# Altium PCB hat.PcbDoc (part 1 of 2)
Units mm, origin at the board's own origin, x right, y up, seen from the top; angles counter-clockwise.
Board outline 64 x 85 mm, 4 copper layers (Top Layer, Ground Plane, Power Plane, Bottom Layer), stack 0.844 mm thick; 119 components, 62 nets, 343 pads, 67 vias.
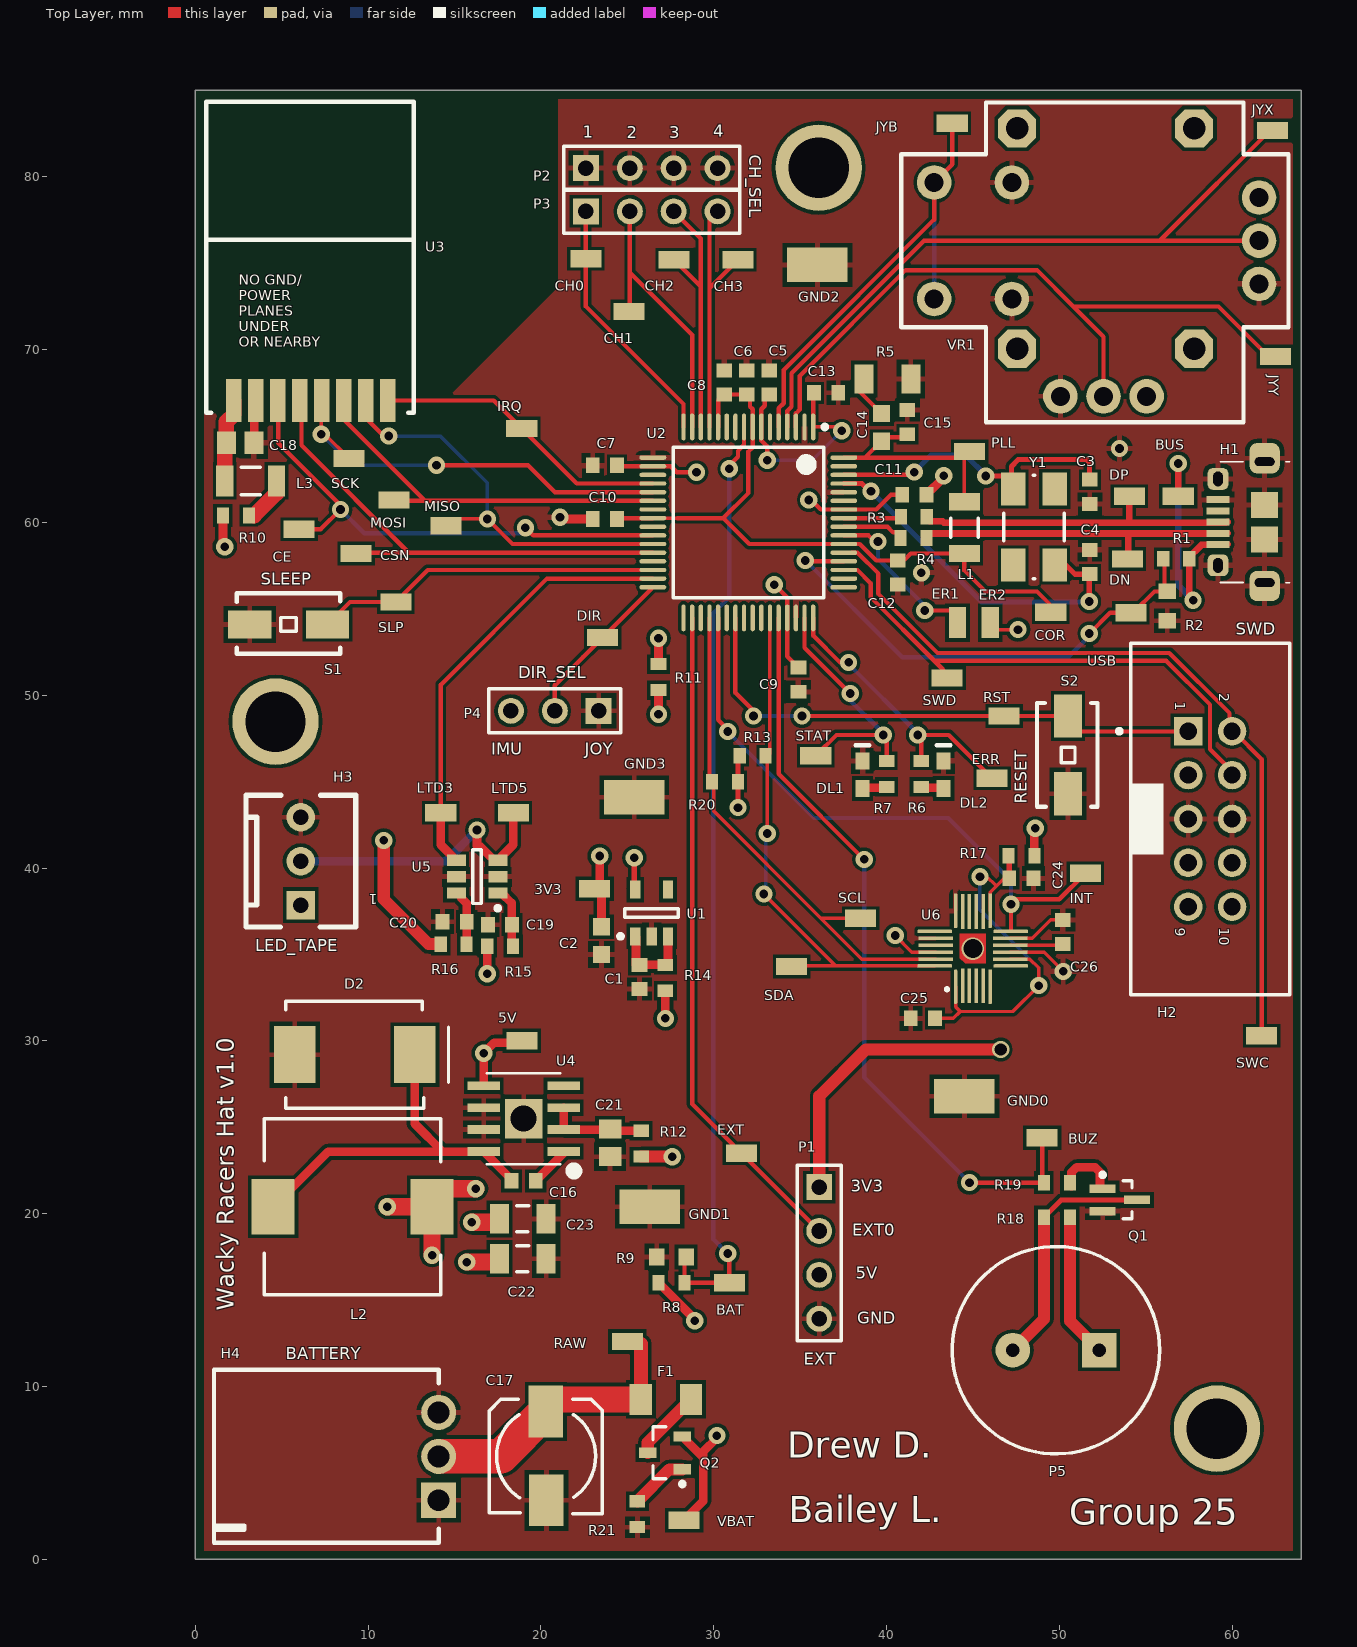
[diagram p0: Top Layer view]
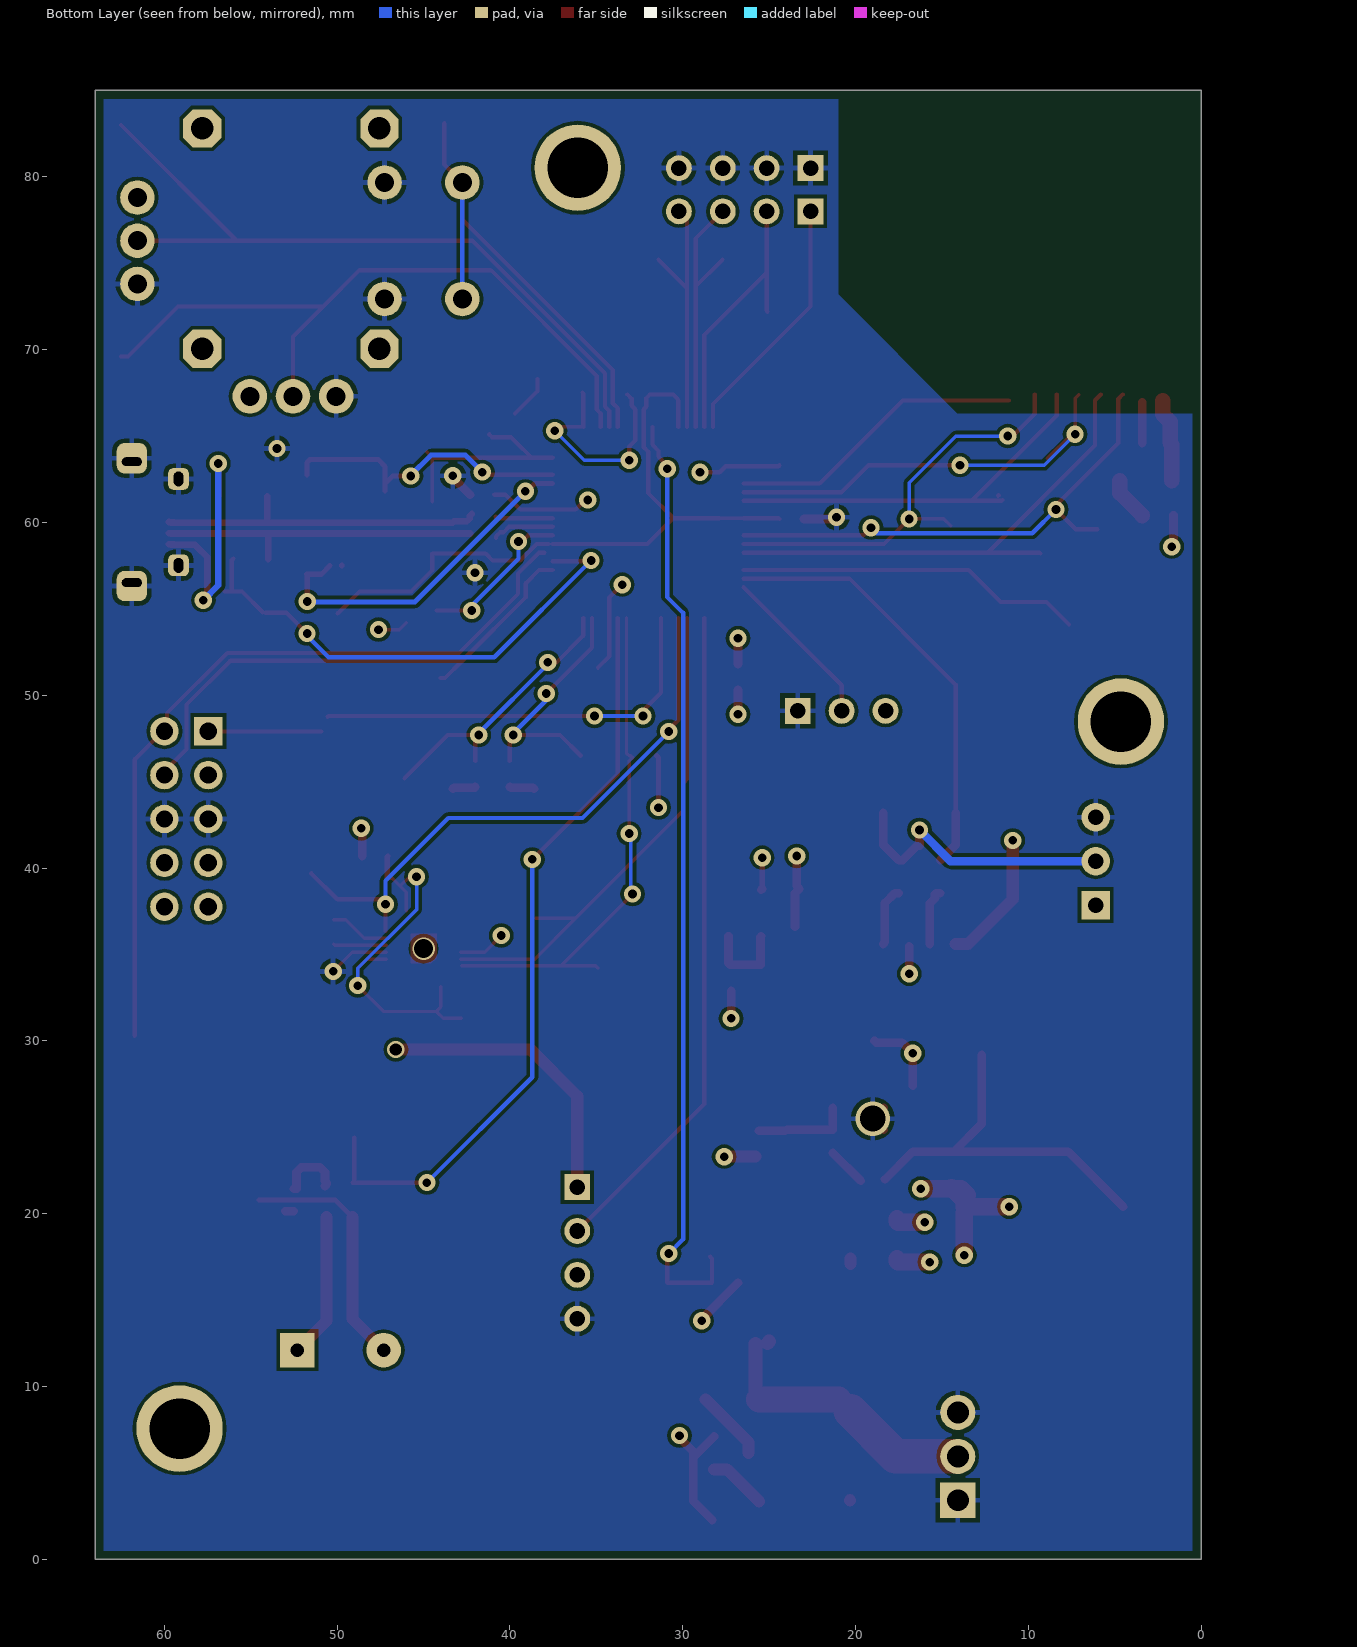
[diagram p1: Bottom Layer view, seen from below]
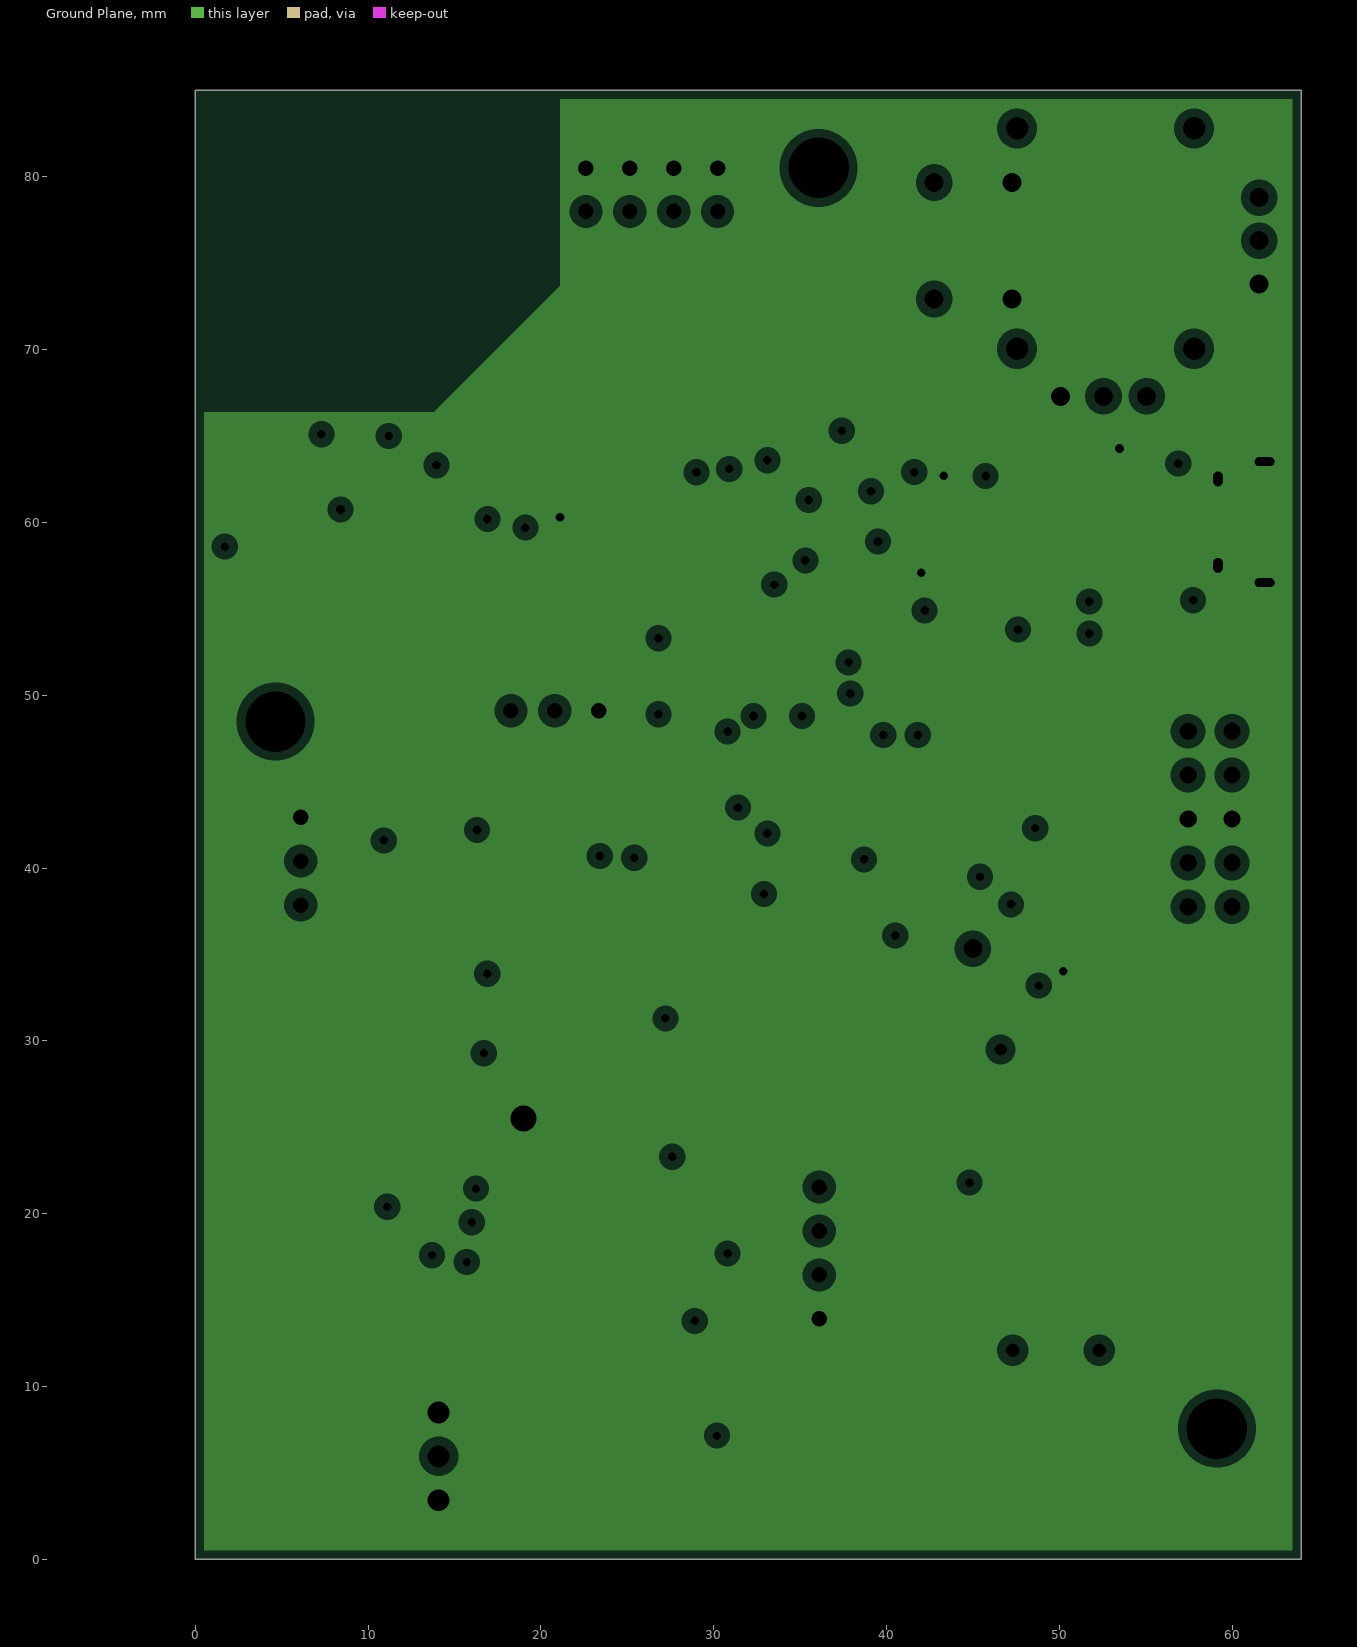
[diagram p2: Ground Plane, clearances drawn from the general rule]
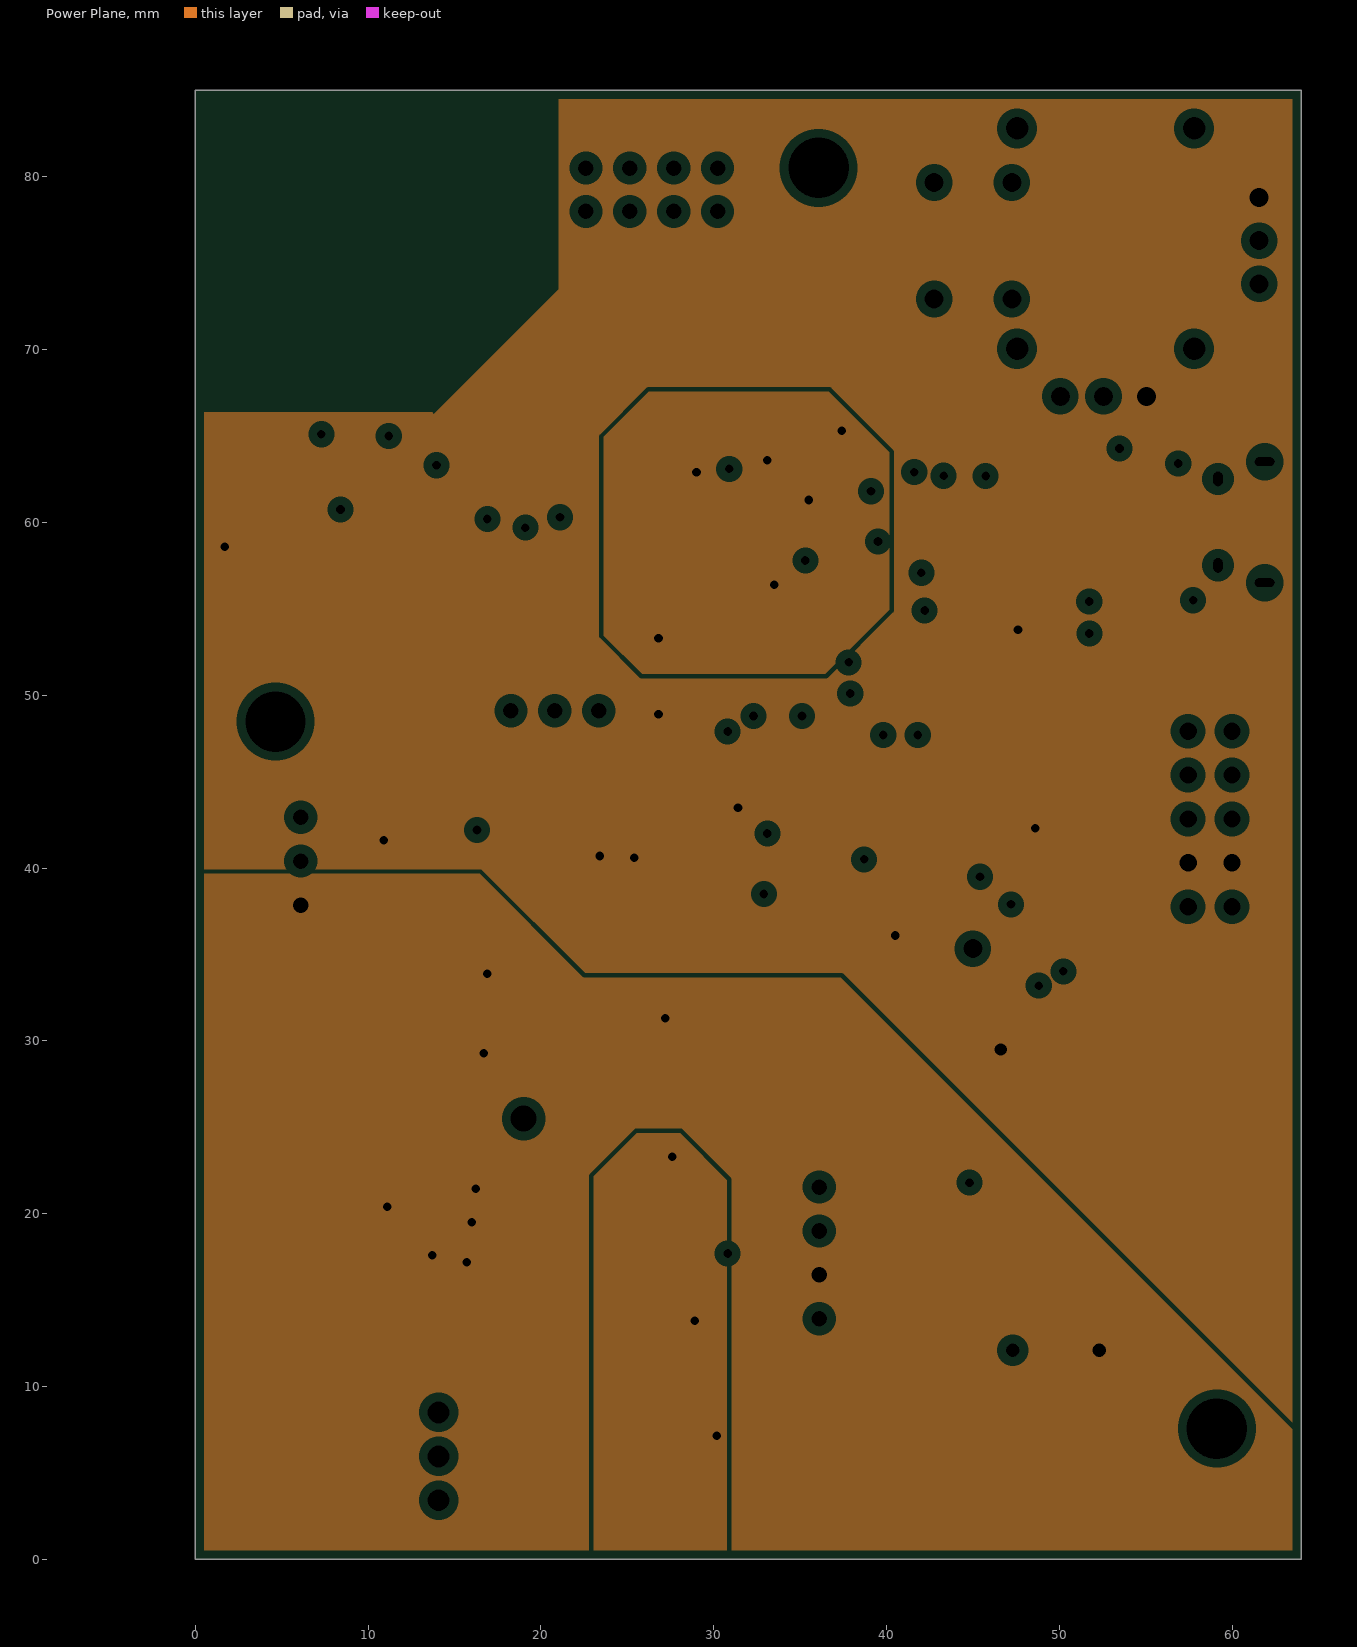
[diagram p3: Power Plane, clearances drawn from the general rule]

## Layer stack, top to bottom
Top Solder: solder mask 0.0102, Solder Resist, Dk 3.5
Top Layer: signal copper 0.0356
Dielectric 1: core 0.32, FR-4, Dk 4.8
Ground Plane: plane copper 0.036, net GND
Dielectric 3: prepreg 0.127, Dk 4.2
Power Plane: plane copper 0.036, net (Multiple Nets)
Dielectric 4: core 0.254, Dk 4.2
Bottom Layer: signal copper 0.0356
Bottom Solder: solder mask 0.0102, Solder Resist, Dk 3.5

## Board outline
0,85 64,85 64,0 0,0 0,85

## Design rules (kind name [scope] priority, off if disabled: settings)
BoardOutlineClearance [All] p1: gap=0.5 ignorepadtopadclearanceinfootprint=FALSE
Clearance GND_POLY [InNamedPolygon('GND')] p1: gap=0.254 ignorepadtopadclearanceinfootprint=FALSE
Clearance Min_Clearance_Circuit_Labs [All] p2: gap=0.2 ignorepadtopadclearanceinfootprint=FALSE
DiffPairsRouting [All] p1: maxlimit=0.254 minlimit=0.254 mostfreqgap=0.254 toplayer_minwidth=0.381 toplayer_maxwidth=0.381 toplayer_prefwidth=0.381 bottomlayer_minwidth=0.381 bottomlayer_maxwidth=0.381 bottomlayer_prefwidth=0.381 maxuncoupledlength=12.7
FanoutControl Fanout_BGA [IsBGA] p1 off: bgadir=Out bgaviamode=Centered fanoutstyle=Auto fanoutdirection=Alternating viagrid=0.025 // Fanout_BGA (Default Rule)
Height [All] p1: minheight=0 maxheight=50.8 prefheight=12.7
HoleSize [All] p1: absolutevalues=TRUE maxlimit=10 minlimit=0.3 maxpercent=80.000 minpercent=20.000
MinimumAnnularRing [All] p1: minimumring=0.1
MinimumSolderMaskSliver [All] p1: minsoldermaskwidth=0.102
NetAntennae [All] p1: netantennaetolerance=1
PlaneClearance [All] p1: clearance=0.508
PlaneConnect [All] p1: planeconnectstyle=Relief reliefexpansion=0.508 reliefentries=4 reliefconductorwidth=0.254 reliefairgap=0.254
PolygonConnect [All] p1: connectstyle=Relief reliefconductorwidth=0.305 reliefentries=4 polygonreliefangle="90 Angle" airgapwidth=0.254
RoutingVias [All] p1: holewidth=0.5 width=1 viastyle="Through Hole" minholewidth=0.3 minwidth=0.8 maxholewidth=1 maxwidth=2
SMDNeckDown [All] p1 off: percent=50.000
SMDToCorner [All] p1: distance=98425
SMDToPlane [All] p1: distance=1968504
SilkToSolderMaskClearance SilkscreenOverComponentPads [IsPad] p1: minsilkscreentomaskgap=0.2 clearancetoexposedcopper=TRUE
SolderMaskExpansion [All] p1: expansion=0.102
ViasUnderSMD [All] p1: allowed=FALSE
Width [All] p1: maxlimit=2 minlimit=0.2 preferedwidth=0.3
21 further rules are at their usual default settings.

## Classes and differential pairs
differential pair D: +D_P -D_N

## Components (designator, comment, footprint, x,y, rotation, side; value= is the part's Value field where it differs from the comment)
3V3 "3V3" TP_0603 23.1,38.8 r0 top value=TP
5V "3V3" TP_0603 18.9,30 r180 top value=TP
BAT "3V3" TP_0603 30.9,16 r180 top value=TP
BUS "3V3" TP_0603 56.873,61.514 r0 top value=TP
BUZ "3V3" TP_0603 49,24.4 r180 top value=TP
C1 "1uF" CAPC1608L 25.7,33.7 r90 top
C2 "4.7uF" CAPC1608N 23.5,35.8 r90 top
C3 "27pF" CAPC1608L 51.761,61.776 r90 top
C4 "27pF" CAPC1608L 51.756,57.711 r270 top
C5 "100nF" CAPC1608L 33.2,68.1 r270 top
C6 "100nF" CAPC1608L 31.9,68.1 r270 top
C7 "100nF" CAPC1608L 23.7,63.3 r0 top
C8 "100nF" CAPC1608L 30.6,68.1 r270 top
C9 "100nF" CAPC1608L 34.9,50.9 r90 top
C10 "100nF" CAPC1608L 23.7,60.2 r0 top
C11 "100nF" CAPC1608L 41.6,61.6 r180 top
C12 "100nF" CAPC1608L 40.65,57.1 r90 top
C13 "100nF" CAPC1608L 36.5,67.5 r180 top
C14 "4.7uF" CAPC1608N 39.7,65.5 r270 top
C15 "100nF" CAPC1608L 41.2,65.8 r90 top
C16 "100nF" CAPC1608L 19,21.9 r0 top
C17 "100uF/16V" NICH-1 20.292,5.976 r90 top
C18 "10uF" CAPC2012L 2.6,64.6 r180 top
C19 "100nF" CAPC1608L 17.63,36.725 r0 top
C20 "100nF" CAPC1608L 15,36.9 r0 top
C21 "10uF" CAPC2012L 24,24.1 r90 top
C22 "22uF" CAPC3216L 18.95,17.4 r180 top
C23 "22uF" CAPC3216L 18.95,19.7 r180 top
C24 "100nF" CAPC1608L 47.8,39.4 r180 top
C25 "10nF" CAPC1608L 42.1,31.3 r180 top
C26 "100nF" CAPC1608L 50.2,36.3 r90 top
CE "3V3" TP_0603 6,59.6 r180 top value=TP
CH0 "3V3" TP_0603 22.6,75.25 r0 top value=TP
CH1 "3V3" TP_0603 25.1,72.2 r180 top value=TP
CH2 "3V3" TP_0603 27.7,75.2 r180 top value=TP
CH3 "3V3" TP_0603 31.4,75.2 r180 top value=TP
COR "3V3" TP_0603 49.5,54.8 r0 top value=TP
CSN "3V3" TP_0603 9.3,58.2 r180 top value=TP
D2 "MBRS330T3G 30V 4A" SMC 9.225,29.2 r0 top
DIR "3V3" TP_0603 23.563,53.338 r180 top value=TP
DL1 "Green" WL-SMCW0603 38.6,46.2 r270 top
DL2 "Red" WL-SMCW0603 43.3,46.2 r270 top
DN "3V3" TP_0603 53.932,57.889 r180 top value=TP
DP "3V3" TP_0603 54.046,61.511 r180 top value=TP
ER1 "Erase" TP_0603 44.1,54.2 r90 top value=TP
ER2 "3V3" TP_0603 46,54.2 r90 top value=TP
ERR "3V3" TP_0603 46.1,45.2 r0 top value=TP
EXT "3V3" TP_0603 31.6,23.5 r0 top value=TP
F1 "2A" RESC3216N 27.231,9.26 r0 top
GND0 "TP" TP_1206 44.5,26.8 r180 top
GND1 "TP" TP_1206 26.3,20.4 r180 top
GND2 "TP" TP_1206 36,74.9 r180 top
GND3 "TP" TP_1206 25.4,44.1 r180 top
H1 "JS_USB_MICRO_B" FCI_USB_10118194-0001LF 63.324,60.016 r90 top
H2 "Header 5X2 Vert" IDC2.54-V10D 58.719,42.84 r270 top
H3 "3 Pin Molex KK Hdr" MOLEX_KK_3_HDR 6.1,37.86 r90 top
H4 "Battery_HEADER_3pin" BATT_HEADER_3POS 14.081,5.96 r90 top
INT "3V3" TP_0603 51.5,39.7 r180 top value=TP
IRQ "3V3" TP_0603 18.885,65.432 r180 top value=TP
JYB "3V3" TP_0603 43.8,83.1 r180 top value=TP
JYX "3V3" TP_0603 62.321,82.682 r180 top value=TP
JYY "3V3" TP_0603 62.5,69.6 r180 top value=TP
L1 "1A max, Idc 0.3R," INDC3216L 44.5,59.7 r270 top
L2 "IND 5.2UH 6A" INDUCTOR5u2 9.1,20.4 r0 top
L3 "1A max, Idc 0.3R," INDC3216L 3.2,62.4 r0 top
LTD3 "3V3" TP_0603 14.2,43.2 r0 top value=TP
LTD5 "3V3" TP_0603 18.4,43.2 r0 top value=TP
MISO "3V3" TP_0603 14.5,59.8 r180 top value=TP
MOSI "3V3" TP_0603 11.5,61.3 r180 top value=TP
P1 "JA_PIN_Header 4" HDR1X4 36.1,21.54 r270 top
P2 "JA_PIN_Header 4" HDR1X4 22.6,80.501 r0 top
P3 "JA_PIN_Header 4" HDR1X4 22.6,78 r0 top
P4 "JA_PIN_Header 3" HDR1X3 23.34,49.1 r180 top
P5 "Piezo Buzzer" BUZZER 52.3,12.1 r180 top
PLL "3V3" TP_0603 44.8,64.1 r0 top value=TP
Q1 "BC817W" SOT323_M 53.5,20.8 r0 top
Q2 "SSM3J328R,LF" SOT23_L 27.181,6.16 r180 top
R1 "27K" RESC1608L 56.76,57.901 r0 top
R2 "47K" RESC1608N 56.235,55.162 r90 top
R3 "27R" RESC1608L 41.575,60.325 r180 top
R4 "27R" RESC1608L 41.55,59.1 r180 top
R5 "1R" RESC3216L 40.05,68.3 r180 top
R6 "3K" RESC1608L 42,45.45 r270 top
R7 "2K" RESC1608L 40,45.45 r270 top
R8 "62K" RESC1608L 27.55,16 r180 top
R9 "47K" RESC1608N 27.55,17.5 r0 top
R10 "0R" RESC1608L 2.35,60.4 r180 top
R11 "0R" RESC1608L 26.8,51.05 r270 top
R12 "0R" RESC1608L 25.8,24.05 r90 top
R13 "4K7" RESC1608L 32.25,46.5 r180 top
R14 "0R" RESC1608L 27.2,33.65 r90 top
R15 "0R" RESC1608L 17.641,35.484 r0 top
R16 "0R" RESC1608L 14.95,35.6 r180 top
R17 "0R" RESC1608L 47.8,40.7 r0 top
R18 "1K" RESC1608L 49.85,19.8 r0 top
R19 "1K" RESC1608L 49.85,21.8 r180 top
R20 "4K7" RESC1608L 30.65,45 r0 top
R21 "1K" RESC1608L 25.581,2.61 r90 top
RAW "3V3" TP_0603 25,12.6 r180 top value=TP
RST "3V3" TP_0603 46.8,48.8 r0 top value=TP
S1 "EVQPNF05M" EVQPNF05M 5.396,54.098 r0 top
S2 "EVQPNF05M" EVQPNF05M 50.5,46.55 r90 top
SCK "3V3" TP_0603 8.9,63.7 r0 top value=TP
SCL "3V3" TP_0603 38.5,37.1 r180 top value=TP
SDA "3V3" TP_0603 34.5,34.3 r180 top value=TP
SLP "3V3" TP_0603 11.6,55.4 r0 top value=TP
STAT "3V3" TP_0603 35.9,46.5 r180 top value=TP
SWC "3V3" TP_0603 61.7,30.3 r180 top value=TP
SWD "3V3" TP_0603 43.5,51 r180 top value=TP
U1 "CAT6219-330TDGT3" SOT95P280X145-5N 26.4,37.4 r90 top
U2 "ATSAM4S8BA-ANR" LQFP64_L 32,60 r270 top locked
U3 "nRF24 SMD" NRF24 0.627,66.353 r0 top
U4 "ADP2302ARDZ-5.0 BUCK" RD_8_1 19,25.5 r180 top locked value=Value
U5 "SN74LVC1T45" SOT23-6_N 16.3,39.5 r180 top
U6 "MPU-9250" QUAD24 43.993,33.985 r90 top locked
USB "3V3" TP_0603 54.134,54.774 r0 top value=TP
VBAT "3V3" TP_0603 28.281,2.26 r0 top value=TP
VR1 "Joystick 10k with Sw" Joystick_Sw 61.55,76.3 r0 top
Y1 "12MHz" 6.0X3.5-4 48.53,59.731 r90 top

## Footprints (in the part's own frame and the unit in brackets; to place one, negate y for a bottom-side part, rotate by r counter-clockwise, add the part's x,y. Pads: shape width x height; smd on the part's side, far side on the other; paste and mask are expansions set on the pad)
6.0X3.5-4 [mm] "4 SMD 6.0X3.5 mm No Lead Crystal"
  rect 1.9x1.4 smd: 1(-2.2,-1.2) 2(2.2,-1.2) 3(2.2,1.2) 4(-2.2,1.2)
  silkscreen extent -3,-1.75 3,1.75, body extent -3,-1.75 3,1.75, height 1.2
BATT_HEADER_3POS [mil]
  rect 80x80 hole 50: 1(-100,0)
  round 80 hole 50: 2(0,0) 3(100,0)
  silkscreen extent -197,0 197,512, body extent -197,-31 200,504, height 294
BUZZER [mm]
  rect 2x2 hole 0.8: 1(0,0)
  round 2 hole 0.8: 2(5,0)
  silkscreen extent -3.5,-6 8.5,6, body extent -3.58,-6.08 8.58,6.08, height 6.5
CAPC1608L [mm] "Chip Capacitor, Body 1.6x0.8mm, IPC High Density"
  rect 0.8x0.9 smd: 1(-0.7,0) 2(0.7,0)
  body extent -0.87,-0.48 0.87,0.48, height 0.85
CAPC1608N [mm] "Chip Capacitor, Body 1.6x0.8mm, IPC Medium Density"
  rect 1x1 smd: 1(-0.8,0) 2(0.8,0)
  body extent -0.87,-0.48 0.87,0.48, height 0.85
CAPC2012L [mm] "Chip Capacitor, Body 2.0x1.3mm, IPC High Density"
  rect 1.1x1.3 smd: 1(-0.8,0) 2(0.8,0)
  body extent -1.1,-0.72 1.1,0.72, height 1.1
CAPC3216L [mm] "Chip Capacitor, Body 3.2x1.6mm, IPC High Density"
  rect 1.1x1.7 smd: 1(-1.35,0) 2(1.35,0)
  silkscreen extent -0.35,-0.75 0.35,0.75, body extent -1.7,-0.9 1.7,0.9, height 1.35
EVQPNF05M [mm] "Panansonic light touch SMD push button switch"
  rect 2.5x1.6 smd: 1(-2.25,0) 2(2.25,0)
  silkscreen extent -3,-1.7 3,1.8, body extent -3,-1.7 3,1.8, height 5
FCI_USB_10118194-0001LF [mm] "Micro USB B Type Receptacle"
  rect 0.4x1.35 smd mask+0.07: 1(-1.3,4.15) 2(-0.65,4.15) 3(0,4.15) 4(0.65,4.15) 5(1.3,4.15)
  rrect50% 1.75x1.75 hole 0.5 slot 1.15 at 90 deg copper offset -0.2,0 paste+0 mask+0.1: 6(-3.5,1.45)
  rrect50% 1.25x1.2 hole 0.55 slot 0.85 at 0 deg: 6(-2.5,4.15) 6(2.5,4.15)
  rect 1.5x1.55 smd: 6(-1,1.45) 6(1,1.45)
  rrect50% 1.75x1.75 hole 0.5 slot 1.15 at 90 deg copper offset 0.2,0 paste+0 mask+0.1: 6(3.5,1.45)
  silkscreen extent -3.5,0 3.5,4
HDR1X3 [mm] "Connector; Header; 3 Position"
  rect 1.5x1.5 hole 0.9: 1(0,0)
  round 1.5 hole 0.9: 2(2.54,0) 3(5.08,0)
  silkscreen extent -1.27,-1.27 6.35,1.27, body extent -1.27,-1.27 6.35,1.27, height 8.89
HDR1X4 [mm] "Connector; Header; 4 Position"
  rect 1.5x1.5 hole 0.9: 1(0,0)
  round 1.5 hole 0.9: 2(2.54,0) 3(5.08,0) 4(7.62,0)
  silkscreen extent -1.27,-1.27 8.89,1.27, body extent -1.26,-1.3 8.86,1.2, height 2.1
IDC2.54-V10D [mm] "Connector; IDC, Low Profile Male Header, Thru-Hole; 10 Position; Vertical; Pitch 2.54 mm; Body 20.32 x 9.2 x 9.45 mm (LxWxH)"
  rect 1.65x1.65 hole 1: 1(-5.08,-1.27)
  round 1.65 hole 1: 2(-5.08,1.27) 3(-2.54,-1.27) 4(-2.54,1.27) 5(0,-1.27) 6(0,1.27) 7(2.54,-1.27) 8(2.54,1.27) 9(5.08,-1.27) 10(5.08,1.27)
  silkscreen extent -10.16,-5.37 10.16,4.6, body extent -10.16,-4.6 10.16,4.6, height 9.45
INDC3216L [mm] "Chip Inductor, Body 3.2x1.6mm, IPC High Density"
  rect 1x1.8 smd: 1(-1.5,0) 2(1.5,0)
  silkscreen extent -0.55,-0.8 0.55,0.8, body extent -1.75,-0.95 1.75,0.95, height 1.9
INDUCTOR5u2 [mm]
  rect 2.5x3.2 smd: 1(-4.6,0) 2(4.6,0)
  silkscreen extent -5.1,-5.1 5.1,5.1, body extent -5,-5 5,5, height 3.8
Joystick_Sw [mm]
  round 2 hole 1.1: 1(0,2.5) 2(0,0) 3(0,-2.5) 4(-6.5,-9) 5(-9,-9) 6(-11.5,-9) 7(-14.3,-3.37) 8(-18.8,-3.37) 9(-18.8,3.37) 10(-14.3,3.37)
  oct 2.2x2.2 hole 1.3: 11(-14,-6.25) 12(-3.75,-6.25) 13(-14,6.5) 14(-3.75,6.5)
  silkscreen extent -20.7,-10.5 1.7,8, body extent -22.72,-12.9 4.9,13.77, height 30.23
LQFP64_L [mm] "Thin QFP, 64-Leads, Body 10x10mm, Pitch 0.5mm, IPC High Density"
  oval 1.55x0.25 smd mask+0.07: 1(-5.525,3.75) 2(-5.525,3.25) 3(-5.525,2.75) 4(-5.525,2.25) 5(-5.525,1.75) 6(-5.525,1.25) 7(-5.525,0.75) 8(-5.525,0.25) 9(-5.525,-0.25) 10(-5.525,-0.75) 11(-5.525,-1.25) 12(-5.525,-1.75) 13(-5.525,-2.25) 14(-5.525,-2.75) 15(-5.525,-3.25) 16(-5.525,-3.75) 33(5.525,-3.75) 34(5.525,-3.25) 35(5.525,-2.75) 36(5.525,-2.25) 37(5.525,-1.75) 38(5.525,-1.25) 39(5.525,-0.75) 40(5.525,-0.25) 41(5.525,0.25) 42(5.525,0.75) 43(5.525,1.25) 44(5.525,1.75) 45(5.525,2.25) 46(5.525,2.75) 47(5.525,3.25) 48(5.525,3.75)
  oval 0.25x1.55 smd mask+0.07: 17(-3.75,-5.525) 18(-3.25,-5.525) 19(-2.75,-5.525) 20(-2.25,-5.525) 21(-1.75,-5.525) 22(-1.25,-5.525) 23(-0.75,-5.525) 24(-0.25,-5.525) 25(0.25,-5.525) 26(0.75,-5.525) 27(1.25,-5.525) 28(1.75,-5.525) 29(2.25,-5.525) 30(2.75,-5.525) 31(3.25,-5.525) 32(3.75,-5.525) 49(3.75,5.525) 50(3.25,5.525) 51(2.75,5.525) 52(2.25,5.525) 53(1.75,5.525) 54(1.25,5.525) 55(0.75,5.525) 56(0.25,5.525) 57(-0.25,5.525) 58(-0.75,5.525) 59(-1.25,5.525) 60(-1.75,5.525) 61(-2.25,5.525) 62(-2.75,5.525) 63(-3.25,5.525) 64(-3.75,5.525)
  silkscreen extent -5.65,-4.35 4.35,4.55, body extent -5,-5 5,5, height 1.6
MOLEX_KK_3_HDR [mil] "MOLEX_KK_3_HDR"
  rect 65x65 hole 35.43: 1(0,0)
  round 65 hole 35.43: 2(100,0) 3(200,0)
  silkscreen extent -50,-125 250,125, body extent -50,-114 250,114, height 461
NICH-1 [mm] "Electrolytic capacitor"
  rect 3x2 smd: 1(-2.561,-0.022) 2(2.584,0.011)
  silkscreen extent -3.34,-3.25 3.3,3.3, body extent -3.2,-3.2 3.2,3.2, height 5.3
NRF24 [mm]
  rect 0.9x2.5 smd: 1(1.6,0.7) 2(2.871,0.7) 3(4.143,0.7) 4(5.414,0.7) 5(6.686,0.7) 6(7.957,0.7) 7(9.229,0.7) 8(10.5,0.7)
  silkscreen extent 0,0 12,18, body extent 0,0 12,18, height 2.27
QUAD24 [mm]
  oval 2x0.2 smd paste+0.02 mask+0.015: 1(-0.85,0)
  rect 2x0.2 smd paste+0.02 mask+0.015: 2(-0.8,-0.4) 3(-0.8,-0.8) 4(-0.8,-1.2) 5(-0.8,-1.6) 14(3.5,-1.6) 15(3.5,-1.2) 16(3.5,-0.8) 17(3.5,-0.4)
  rrect50% 2x0.2 smd paste+0.02 mask+0.015: 6(-0.85,-2) 13(3.55,-2) 18(3.55,0)
  rrect50% 0.2x2 smd paste+0.02 mask+0.015: 7(0.35,-3.2) 12(2.35,-3.2) 19(2.35,1.2) 24(0.35,1.2)
  rect 0.2x2 smd paste+0.02 mask+0.015: 8(0.75,-3.15) 9(1.15,-3.15) 10(1.55,-3.15) 11(1.95,-3.15) 20(1.95,1.15) 21(1.55,1.15) 22(1.15,1.15) 23(0.75,1.15)
  Top Layer region: 0.5,-1.75 0.5,-0.55 0.8,-0.25 2.2,-0.25 2.2,-1.75
  silkscreen extent -1.05,0.45 -0.95,0.55
RD_8_1 [mil]
  rect 74x20 smd paste+0 mask+0: 1(-91,75) 2(-91,25) 3(-91,-25) 4(-91,-75) 5(91,-75) 6(91,-25) 7(91,25) 8(91,75)
  rect 84.65x90 smd paste-44.5 mask+0: EPAD(0,0)
  silkscreen extent -118,-104 84,123, body extent 0,0 10,10, height 10
RESC1608L [mm] "Chip Resistor, Body 1.6x0.8mm, IPC High Density"
  rect 0.7x0.9 smd: 1(-0.75,0) 2(0.75,0)
  body extent -0.85,-0.48 0.85,0.48, height 0.9
RESC1608N [mm] "Chip Resistor, Body 1.6x0.8mm, IPC Medium Density"
  rect 0.9x1 smd: 1(-0.85,0) 2(0.85,0)
  body extent -0.85,-0.48 0.85,0.48, height 0.6
RESC3216L [mm] "Chip Resistor, Body 3.1x1.6mm, IPC High Density"
  rect 1.1x1.7 smd: 1(-1.35,0) 2(1.35,0)
  body extent -1.68,-0.87 1.68,0.87, height 2.54
RESC3216N [mm] "Chip Resistor, Body 3.2x1.6mm, IPC Medium Density"
  rect 1.3x1.8 smd: 1(-1.45,0) 2(1.45,0)
  body extent -1.68,-0.87 1.68,0.87, height 0.71
SMC [mm] "DO-214-AB/SMC; 2 C-Bend Leads; Body 7.9 x 5.9 mm, inc. leads (LxW)"
  rect 2.4x3.3 smd: 1(-3.475,0) 2(3.475,0)
  silkscreen extent -4,-3.1 5.43,3.1, body extent -4.22,-2.95 3.72,2.95, height 2.27
SOT23-6_N [mm]
  rect 1.1x0.65 smd: 1(-1.2,0.95) 2(-1.2,0) 3(-1.2,-0.95) 4(1.2,-0.95) 5(1.2,0) 6(1.2,0.95)
  silkscreen extent -1.33,-1.55 0.25,1.95, body extent -0.9,-1.55 0.9,1.55, height 1.45
SOT23_L [mm] "SOT23, 3-Leads, Body 2.9x1.3mm, Pitch 0.95mm, Lead Span 2.3mm, IPC High Density"
  rect 1x0.6 smd: 1(-1,0.95) 2(-1,-0.95) 3(1,0)
  silkscreen extent -1.13,-1.5 0.7,1.92, body extent -0.7,-1.5 0.7,1.5, height 1.1
SOT95P280X145-5N [mm] "SOT23, 5-Leads, Body 2.90x2.80mm, Pitch 0.95mm, IPC Medium Density"
  rect 1.05x0.6 smd: 1(-1.35,0.95) 2(-1.35,0) 3(-1.35,-0.95) 4(1.35,-0.95) 5(1.35,0.95)
  silkscreen extent -1.47,-1.55 0.25,1.92, body extent -0.87,-1.52 0.87,1.53, height 1.45
SOT323_M [mm] "SOT323, 3-Leads, Body 2.0x1.3mm, Pitch 0.65mm, Lead Span 2.1mm, IPC Low Density"
  rect 1.5x0.5 smd: 1(-1,0.65) 2(-1,-0.65) 3(1,0)
  silkscreen extent -1.12,-1.1 0.7,1.57, body extent -0.7,-1.1 0.7,1.1, height 1.1
TP_0603 [mm] "TestPoint 0603"
  rect 1.8x1 smd: 1(0,0)
  body extent -1,-0.6 1,0.6, height 0.9
TP_1206 [mm] "Test Point Pad"
  rect 3.5x2 smd: 1(0,0)
  body extent -1.62,-0.85 1.63,0.8, height 2
WL-SMCW0603 [mm] "2.4 x 0.8 x 0.7mm LED"
  rect 1x0.8 smd: 1(0,0) 2(1.6,0)
  silkscreen extent -0.9,-0.4 -0.9,0.4

## Part data
3V3 5V BAT BUS BUZ CE CH0 CH1 CH2 CH3 COR CSN DIR DN DP ER1 ER2 ERR EXT GND0 GND1 GND2 GND3 INT IRQ JYB JYX JYY LTD3 LTD5 MISO MOSI PLL RAW RST SCK SCL SDA SLP STAT SWC SWD USB VBAT: library part TP_1206, "Test-Point 3.3x1.6x2.1mm SMD", Manufacturer="Harwin Inc", Manufacturer Part Number=S1751-46R, Supplier Part Number 1=952-1478-2-ND, Mounting Type="Surface Mount", Storage Location=ProtoPlace, Supplier="ECE Dept", Supplier 1=Digi-Key, Supplier 2=Farnell, Supplier Part Number 2=1826282, Type="PC Test Point"
C1: library part CC_1uF_0603, "CAP CER 1uF Y5V -20% +80% 16V 0603", Max Voltage=16V, Code_IPC="1608 [0603]", PackageReference=0603, Storage Location="PCB Assembly WS", Supplier="ECE Dept"
C2 C14: library part CC_4.7uF_0603, "CAP CER 4.7uF X5R +-20%  10V 0603", Max Voltage=10V, Code_IPC=2012[0805], Note="Footprint corresponds to dimensions for bulk cassette packaging. This case size has tightened tolerances.", PackageReference=0805, Storage Location="PCB Assembly WS", Supplier="ECE Dept"
C3 C4: library part CC_27pF_0603, "CAP CER 27pF NPO/COG +-5% 50V 0603", Code_IPC="1608 [0603]", PackageReference=0603, Storage Location="PCB Assembly WS", Supplier="ECE Dept"
C5 C6 C7 C8 C9 C10 C11 C12 C13 C15 C16 C19 C20 C24 C26: library part CC_100nF_0603, "CAP CER 100nF X7R +-10% 50V 0603", Code_IPC="1608 [0603]", PackageReference=0603, Storage Location="PCB Assembly WS", Supplier="ECE Dept"
C17: library part CA_100uF_16V, "CAP ALUM 100uF 16V SMD", Manufacturer=Nichcon, Manufacturer PN=UWX1C101MCL1GB, Supplier Part Number 1=1870677, Storage Location="PCB Assembly WS", Supplier="ECE Dept", Supplier 1=Farnell, Supplier 2=Digi-Key, Supplier Part Number 2=493-2105-1-ND
C18 C21: library part CC_10uF_0805_16V, "CAP CER 10uF X5R 16V 0805", Manufacturer="Samsung Electro-Mechanics", Manufacturer Part Number=CL21A106KOQNNWE, Max Voltage=16V, Operating Temperature="-55°C ~ 85°C", Package / Case="0805 (2012 Metric)", Ratings=-, Supplier Part Number 1=1276-2894-1-ND, Temperature Coefficient=X5R, Tolerance=±10%, Applications="General Purpose", Category=Capacitors, Code_IPC=2012[0805], ComponentLink1Description=http://www.samsungsem.com/kr/support/product-search/mlcc/CL21A106KOQNNWE.jsp, ComponentLink1URL=http://www.samsungsem.com/kr/support/product-search/mlcc/CL21A106KOQNNWE.jsp, Features=-, Height - Seated (Max)=-, Lead Spacing=-, Lead Style=-, Mounting Type="Surface Mount, MLCC", Note="Footprint corresponds to dimensions for bulk cassette packaging. This case size has tightened tolerances.", Notification="Current market demand for these product types have resulted in fluctuating and extending lead times. Lead times may differ.", PackageReference=0805, Packaging="Cut Tape (CT)", Part Status=Active, Pricing 1="1=0.35, 10=0.25, 100=0.1178, 500=0.08254, 1000=0.06831 (NZD)", RoHS="RoHS Compliant", Size / Dimension="0.079\" L x 0.049\" W (2.00mm x 1.25mm)", Stock 1=20000, Supplier 1=Digi-Key, Thickness (Max)="0.055\" (1.40mm)", Voltage - Rated=16V
C22 C23: library part CC_22uF_1206, "CAP CER 22uF Y5V -20% +80% 10V 1206", Dielectric=Y5V, Max Voltage=10V, Storage Location="PCB Assembly WS", Supplier="ECE Dept"
C25: library part CC_10nF_0603, "CAP CER 10nF X7R +-10% 50V 0603", Code_IPC="1608 [0603]", PackageReference=0603, Storage Location="PCB Assembly WS", Supplier="ECE Dept"
D2: library part MBRS330T3G, "SCHOTTKY  30V 4A", Base Part Number=MBRS330, Capacitance @ Vr, F=-, Current - Average Rectified (Io)=4A, Manufacturer="ON Semiconductor", Operating Temperature - Junction="-65°C ~ 150°C", Package / Case="DO-214AB, SMC", Supplier Device Package=SMC, Supplier Part Number 1=MBRS330T3GOSCT-ND, Category="Discrete Semiconductor Products", ComponentLink1Description=http://www.onsemi.com/pub/Collateral/MBRS340T3-D.PDF, ComponentLink1URL=http://www.onsemi.com/pub/Collateral/MBRS340T3-D.PDF, Diode Type=Schottky, Manufacturer Part Number=MBRS330T3G, Mounting Type="Surface Mount", Packaging="Cut Tape (CT)", Part Status=Active, Pricing 1="1=0.93, 10=0.79, 100=0.5902, 500=0.46368, 1000=0.35829 (NZD)", RoHS="RoHS Compliant", Speed="Fast Recovery =< 500ns, > 200mA (Io)", Stock 1=8919, Supplier 1=Digi-Key
DL1: library part DL_150060GS75000, "LED Green 430mcd 0603 SMD", Forward Current If=30, Forward Voltage=3.2, Manufacturer="WURTH ELEKTRONIK", Manufacturer Part Number=150060GS75000, Supplier Part Number 1=2322070, LED Colour=Green, LED Mounting=SMD, Lens Shape=Rectangular, Luminous Intensity=430, Storage Location="PCB Assembly WS", Supplier="ECE Dept", Supplier 1=Farnell, Viewing Angle=140°, Wavelength Typ=520
DL2: library part DL_150060RS75000, "LED Red 250mcd 0603 SMD", Forward Current If=30, Forward Voltage=2, Manufacturer="WURTH ELEKTRONIK", Manufacturer Part Number=150060RS75000, Supplier Part Number 1=2322071, LED Colour=Red, LED Mounting=SMD, Lens Shape=Rectangular, Luminous Intensity=250, Storage Location="PCB Assembly WS", Supplier="ECE Dept", Supplier 1=Farnell, Viewing Angle=140°, Wavelength Typ=625
F1: library part FS_Fuse_2.0A, "Fuse 2.0A Very Fast Acting 1206 SMD", Manufacturer=MULTICOMP, Manufacturer Part Number="MC12CF 002", Supplier Part Number 1=1841029, Manufacturer PN="MC12CF 002", Storage Location="PCB Assembly WS", Supplier="ECE Dept", Supplier 1=Farnell
H1: library part JS_USB_MICRO_B_SMT, "CONN USB MICRO B RECPT SMT R/A", Manufacturer=FCI, Manufacturer Part Number=10118194-0001LF, Supplier Part Number 1=609-4618-1-ND, Features="Shielded, Solder Retention", Gender=Receptacle, Mounting Type="Surface Mount, Right Angle, Horizontal", Number of Contacts=5, Specifications="USB 2.0", Supplier 1=Digi-Key
H2: library part JA_HDR_IDC_5X2_VERT, "IDC Header, 2,54mm, 10-Pin, Vert", Supplier Part Number 1=1096985, Storage Location="ECE Dept Store", Supplier="ECE Dept", Supplier 1=Farnell
H3: library part LED_Strip_Header, "CONN HEADER 3POS 2.54mm VERT_Thru Hole", Manufacturer=Molex, Manufacturer PN=22-23-2031, Supplier Part Number 1=9731156, Storage Location="ECE Dept Store", Supplier="ECE Dept", Supplier 1=Farnell
H4: "3Pin Header 2.54mm spacing / Digikey #WM22663-ND", Supplier Part Number 1=WM22663-ND, Supplier 1=Digi-Key
L1 L3: library part IN_Ferrite-Bead, "Ferrite Bead, Rdc 0.3R, Z100MHZ 600R, Imax 1A, SMD 1206", DC Current Rating=1, DC Resistance Max=0.08, Ferrite Case Style="1206 ^3216 Metric]", Frequency Range="50MHz to 1", Impedance Tolerance="± 25%", Manufacturer=FAIR-RITE, Manufacturer Part Number=2512066017Y1, Supplier Part Number 1=1612060, Ferrite Mounting=SMD, Impedance=600, Manufacturer PN=2512066017Y1, Storage Location="PCB Assembly WS", Supplier="ECE Dept", Supplier 1=Farnell
L2: library part CDRH104RNP-5R2NC, "FIXED IND 5.2UH 6A 22 MOHM SMD", Current - Saturation=5.6A, DC Resistance (DCR)="22 mOhm Max", Frequency - Self Resonant=-, Manufacturer="Sumida America Components Inc.", Operating Temperature="-40°C ~ 100°C", Package / Case=Nonstandard, Supplier Part Number 1=308-2280-1-ND, Tolerance=±30%, Category="Inductors, Coils, Chokes", ComponentLink1Description=http://products.sumida.com/products/pdf/CDRH104R.pdf, ComponentLink1URL=http://products.sumida.com/products/pdf/CDRH104R.pdf, Height - Seated (Max)="0.157\" (4.00mm)", Manufacturer Part Number=CDRH104RNP-5R2NC, Material - Core=Ferrite, Mounting Type="Surface Mount", Packaging="Cut Tape (CT)", Part Status=Active, Pricing 1="1=2.9, 10=2.678, 100=1.8743, 500=1.5173 (NZD)", Q @ Freq=-, Ratings=-, RoHS="RoHS Compliant", Shielding=Shielded, Size / Dimension="0.402\" L x 0.394\" W (10.20mm x 10.00mm)", Stock 1=3849, Supplier 1=Digi-Key, Supplier Device Package=-, Type=-
P1 P2 P3: "Header, 4-Pin", LatestRevisionDate=17-Jul-2002, LatestRevisionNote="Re-released for DXP Platform.", Publisher="Altium Limited"
P4: "Header, 3-Pin", LatestRevisionDate=17-Jul-2002, LatestRevisionNote="Re-released for DXP Platform.", Publisher="Altium Limited"
P5: "TDK - PS1240P02BT - BUZZER, PIEZO, 70DB, 12.2MM", Frequency=4kHz, Manufacturer 1=TDK, Manufacturer Part Number 1=PS1240P02BT, Max Operating Temperature=70°C, Min Operating Temperature=-10°C, Operating Supply Voltage=3V, Package Quantity=1, Supplier Part Number 1=445-2525-1-ND, ComponentLink1Description=https://datasheet.ciiva.com/0/ef532-ps-112.pdf?src-supplier=Digi-Key, ComponentLink1URL=https://datasheet.ciiva.com/0/ef532-ps-112.pdf?src-supplier=Digi-Key, ComponentLink2Description=https://datasheet.ciiva.com/0/ef532-ps-111.pdf?src-supplier=Digi-Key, ComponentLink2URL=https://datasheet.ciiva.com/0/ef532-ps-111.pdf?src-supplier=Digi-Key, ComponentLink3Description=https://datasheet.ciiva.com/3306/ef532-ps-3306958.pdf?src-supplier=Avnet, ComponentLink3URL=https://datasheet.ciiva.com/3306/ef532-ps-3306958.pdf?src-supplier=Avnet, ComponentLink4Description=https://datasheet.ciiva.com/16225/ef532-ps-16225062.pdf?src-supplier=Onlinecomponents.com, ComponentLink4URL=https://datasheet.ciiva.com/16225/ef532-ps-16225062.pdf?src-supplier=Onlinecomponents.com, Diameter=12.2mm, Height=6.5mm, Lead Free="Lead Free", Mount="Through Hole", Number of Pins=2, Number of Terminals/Pins=2, Packaging="Tape and Reel", Pricing 1="1=0.61000, 10=0.52500, 25=0.49120, 50=0.46580, 100=0.44110 (USD)", RoHS=Yes, RoHS Compliant=Yes, Series=PS, Stock 1=24025, Supplier 1=Digi-Key, Termination="PC Pins", Voltage Rating (DC)=3V, Washable=No
Q1: library part TB_BC817W, "NPN GP Bipolar Transistor 45V 500mA SOT323", Manufacturer=NXP, Supplier Part Number 1=2114873, Manufacturer PN=BC817W, Storage Location="PCB Assembly WS", Supplier="ECE Dept", Supplier 1=Farnell, Supplier 2=Digi-Key, Supplier Part Number 2=1727-4843-1-ND
Q2: library part TM_SSM3J328R, "MOSFET P-CH 20V 6A SOT23-3", Case/Package=SOT-23-3, Continuous Drain Current (ID)=6A, Drain to Source Breakdown Voltage=-20V, Drain to Source Resistance=47.4mR, Drain to Source Voltage (Vdss)=20V, Gate to Source Voltage (Vgs)=8V, Input Capacitance=840pF, Input Capacitance (Ciss) @ Vds="840pF @ 10V", Manufacturer=Toshiba, Max Operating Temperature=150°C, Max Power Dissipation=1W, Min Operating Temperature=-55°C, Package / Case="SOT-23-3 Flat Leads", Package Quantity=3000, Power Dissipation=2W, Supplier Device Package=SOT-23F, Supplier Part Number=SSM3J328RLFDKR-ND, ComponentLink1Description=https://datasheet.ciiva.com/11158/ssm3j328r-datasheet-en-20140301-11158652.pdf, ComponentLink1URL=https://datasheet.ciiva.com/11158/ssm3j328r-datasheet-en-20140301-11158652.pdf, Current - Continuous Drain (Id) @ 25° C=6A, Element Configuration=Single, FET Feature="Logic Level Gate, 1.5V Drive", FET Type="MOSFET P-Channel, Metal Oxide", Gate Charge (Qg) @ Vgs="12.8nC @ 4.5V", Manufacturer Part Number=SSM3J328R,LF, Mount="Surface Mount", Number of Channels=1, Number of Elements=1, Number of Pins=3, Packaging="Tape and Reel", Power - Max=1W, Pricing="1=0.79, 10=0.658, 25=0.5772, 100=0.4939, 250=0.42836, 500=0.36284, 1000=0.27972 (NZD)", Radiation Hardening=No, Rds On Max=29.8mR, Storage Location="PCB Assembly WS", Supplier=Digi-Key, Supplier 1=Digi-Key, Supplier Part Number 1=SSM3J328RLFDKR-ND, Turn-Off Delay Time=107ns, Turn-On Delay Time=32ns, Vgs(th) (Max) @ Id="1V @ 1mA"
R1: library part RS_27K, "RES 27K OHM 1/10W 5% 0603 SMD", Storage Location="PCB Assembly WS", Supplier="ECE Dept"
R2 R9: library part RS_47K, "RES 47.0K OHM 1/10W 5% 0603 SMD", Storage Location="PCB Assembly WS", Supplier="ECE Dept"
R3 R4: library part RS_27R, "RES 27 OHM 1/10W 5% 0603 SMD", Storage Location="PCB Assembly WS", Supplier="ECE Dept"
R5: library part RT_1R, "RES 1R OHM 1/4W 5% 1206 SMD", Storage Location="PCB Assembly WS", Supplier="ECE Dept"
R6: library part RS_3K, "RES 3K OHM 1/10W 5% 0603 SMD", Storage Location="PCB Assembly WS", Supplier="ECE Dept"
R7: library part RS_2K, "RES 2K OHM 1/10W 5% 0603 SMD", Storage Location="PCB Assembly WS", Supplier="ECE Dept"
R8: library part RS_62K, "RES 62.0K OHM 1/10W 5% 0603 SMD", Storage Location="PCB Assembly WS", Supplier="ECE Dept"
R10 R11 R12 R14 R15 R16 R17: library part RS_0R0, "RES 0.0 OHM 1/10W 5% 0603 SMD", Storage Location="PCB Assembly WS", Supplier="ECE Dept"
R13 R20: library part RS_4K7, "RES 4.7K OHM 1/10W 5% 0603 SMD", Storage Location="PCB Assembly WS", Supplier="ECE Dept"
R18 R19 R21: library part RS_1K, "RES 1.0K OHM 1/10W 5% 0603 SMD", Storage Location="PCB Assembly WS", Supplier="ECE Dept"
S1 S2: library part WS_EVQPNF05M, "Panasonic 6 x 3.5mm SMD Light Touch Switch Type SMD", Manufacturer=Panasonic, Supplier Part Number 1=2079481, Manufacturer PN=EVQPNF05M, PackageDescription="6.0 x 3.5 mm", Storage Location="PCB Assembly WS", Supplier="ECE Dept", Supplier 1=Farnell, Supplier 2=Digi-Key, Supplier Part Number 2=P13598SCT-ND
U1: library part SV_CAT6219-330TDGT3, "IC REG LIN 3.3V 500MA TSOT23-5", Base Part Number=CAT6219, Current - Output=500mA, Package / Case="SOT-23-5 Thin, TSOT-23-5", Supplier Device Package=TSOT-23-5, Supplier Part Number=CAT6219-330TDGT3CT-ND, Voltage - Input (Max)=5.5V, Voltage - Output (Min/Fixed)=3.3V, Voltage Dropout (Max)="0.5V @ 500mA", ComponentLink1Description=http://www.onsemi.com/pub/Collateral/CAT6219-D.PDF, ComponentLink1URL=http://www.onsemi.com/pub/Collateral/CAT6219-D.PDF, Manufacturer Part Number=CAT6219-330TDGT3, Supplier=Digi-Key, Supplier 1=Digi-Key
U2: library part SE_ATSAM4S16BA-MU, "IC MCU 32BIT 512KB FLASH 64LQFP", Manufacturer=Atmel, Package / Case=64-LQFP, Supplier Part Number 1=ATSAM4S8BA-ANRCT-ND, Voltage - Supply (Vcc/Vdd)="1.62 V ~ 3.6 V", Code_JEDEC=MO-220VMMD-3, ComponentLink1Description="Manufacturer URL", ComponentLink1URL=http://www.atmel.com/, ComponentLink2Description="SAM4S Series Datasheet", ComponentLink2URL=http://www.atmel.com/dyn/resources/prod_documents/11100.pdf, ComponentLink3Description="SAM4S Series Summary", ComponentLink3URL=http://www.atmel.com/dyn/resources/prod_documents/11100S.pdf, Connectivity="I²C, IrDA, Memory Card, SPI, SSC, UART/USART, USB", Core Processor="ARM® Cortex®-M4", Core Size=32-Bit, Data Converters="A/D 11x12b, D/A 2x12b", Manufacturer Part Number=ATSAM4S8BA-ANR, Number of I/O=47, PackageDescription="64-Pin Quad Flat No-Lead (QFN) Sawn, 9 x 9 x 1.0 mm Body, 0.5 mm Pitch, Exposed Pad", PackageReference=64PS, PackageVersion="revJ, Jul-2007", Packaging="Cut Tape (CT)", Peripherals="Brown-out Detect/Reset, DMA, POR, PWM, WDT", Program Memory Size="512KB (512K x 8)", Program Memory Type=FLASH, RAM Size="128K x 8", Speed=120MHz, Supplier 1=Digi-Key
U3: library part NRF24, "nRF24 SMD Module", Warning="No power planes near or under device"
U4: library part ADP2302ARDZ-5.0-R7, "IC REG BUCK 5V 2A 8SOIC", Current - Output=2A, Frequency - Switching=700kHz, Supplier Part Number 1=ADP2302ARDZ-5.0-R7CT-ND, Voltage - Input (Max)=20V, Voltage - Output (Min/Fixed)=5V, Manufacturer_Part_Number=ADP2302ARDZ-5.0-R7, Output Type=Fixed, Supplier 1=Digi-Key, Type=DEV, Vendor="Analog Devices Inc"
U5: "1.8V - 5V level converter"
U6: "9 axis IMU"
VR1: "JOYSTICK 10K OHM 2 AXIS TH", Manufacturer 1=SparkFun, Manufacturer Part Number 1=COM-09032, Supplier Part Number 1=1568-1526-ND, ComponentLink1Description=https://media.digikey.com/pdf/Data%20Sheets/Sparkfun%20PDFs/COM-09032_Web.pdf?src-supplier=Digi-Key, ComponentLink1URL=https://media.digikey.com/pdf/Data%20Sheets/Sparkfun%20PDFs/COM-09032_Web.pdf?src-supplier=Digi-Key, Pricing 1="1=3.95000 (USD)", RoHS=No, Stock 1=563, Supplier 1=Digi-Key
Y1: library part XT_CRYSTAL_12MHz_18pF, "CRYSTAL 12MHZ 18PF 6X3.5mm SMD", ESR (Equivalent Series Resistance)="60 Ohm", Frequency Stability=±50ppm, Frequency Tolerance=±30ppm, Load Capacitance=18pF, Manufacturer="CTS-Frequency Controls", Manufacturer Part Number=406C35D12M00000, Operating Mode=Fundamental, Operating Temperature="-20°C ~ 70°C", Package / Case="4-SMD, No Lead (DFN, LCC)", Supplier Part Number 1=CTX855CT-ND, Frequency=12MHz, Height="0.047\" (1.20mm)", Mounting Type="Surface Mount", Size / Dimension="0.236\" L x 0.138\" W (6.00mm x 3.50mm)", Supplier 1=Digi-Key

## Free pads (board coordinates)
  round 5 hole 3.5: 2(4.638,48.477) 2(36.068,80.521) 2(59.115,7.568)

## Via types
v1: diameter 1, hole 0.5, Top Layer to Bottom Layer, 64 vias
v2: diameter 1, hole 0.711, Top Layer to Bottom Layer, 1 vias
v3: diameter 1.3, hole 1.1, Top Layer to Bottom Layer, 1 vias
v4: diameter 2, hole 1.5, Top Layer to Bottom Layer, 1 vias

## Nets (pads, with @x,y where several pads share a name; then routed paths per layer and width w, separated by ;. In a path a pad name is that pad's centre, name@x,y a point inside that pad or via, vN(x,y) a via of type N, cw(c..) or ccw(c..) an arc to the next point about the centre after c; other vN are vias at no path point)
3V3: 3V3.1 C2.2 ER2.1 H2.7 H2.8 P1.1 R10.2 R11.2 R13.2 R16.2 R17.2 R20.2 U1.5 U6.22 VR1.1 VR1.4 | length 43.2
  Top Layer w0.2: v1@1.6,58.7 v1(1.7,58.6) ; v1(40.5,36.1) 41.465,35.135 U6.22 ; ER2.1 46.4,53.8 v1(47.6,53.8) ; v1@48.55,42.25 v1(48.6,42.3)
  Top Layer w0.3: U1.5@25.4,38.8 v1(25.4,40.6) ; v1(31.4,43.5) R20.2 31.4,46.4 R13.2
  Top Layer w0.5: v1@1.6,58.7 R10.2 ; v1(23.4,40.7) 23.4,38.95 23.25,38.8 23.5,38.55 C2.2 ; U1.5@25.4,38.8 U1.5 ; v1(26.8,48.9) R11.2 ; R17.2 v1@48.55,42.25
  Top Layer w0.7: v1(10.9,41.6) 10.9,38.2 13.5,35.6 R16.2 ; P1.1 36.1,26.8 38.8,29.5 v2(46.6,29.5)
5V: 5V.1 C22.2 C23.2 H3.1 L2.2 P1.3 P5.1 R14.1 R15.1 R18.2 U4.5 | length 29.3
  Top Layer w0.2: L2.2@13.35,20.4 L2.2@13.7,20.05
  Top Layer w0.5: U4.5 v1(16.689,29.289) 17.3,29.9 18.8,29.9 5V.1 ; v1(16.891,33.884) R15.1 ; v1(27.2,31.3) R14.1
  Top Layer w0.7: R18.2 50.6,13.8 P5.1
  Top Layer w1: v1(11.1,20.4) L2.2@13.35,20.4 ; L2.2@13.529,21.098 13.882,21.451 L2.2@14.401,21.451 ; v1(13.7,17.6) L2.2@13.7,20.05 ; L2.2 13.7,20.75 L2.2@14.401,21.451 ; L2.2@14.45,21.5 L2.2@14.401,21.451 ; v1(15.7,17.2) 17.55,17.2 17.6,17.25 C22.2 ; v1(16,19.5) 17.55,19.5 17.6,19.55 C23.2 ; v1(16.233,21.451) L2.2@14.401,21.451
BAT_LEVEL: BAT.1 R8.1 R9.2 U2.9 | length 54.8
  Top Layer w0.25: R9.2 28.3,17.4 R8.1 BAT.1 30.9,17.6 v1(30.8,17.7) ; v1(30.9,63.1) 30.9,63.303 31.397,63.8 31.397,64.137 31.75,64.49 U2.9
  Bottom Layer w0.25: v1(30.8,17.7) 29.975,18.525 29.975,54.765 30.9,55.69 v1(30.9,63.1)
BUZZER: BUZ.1 R19.2 U2.44 | length 44.2
  Top Layer w0.25: 33.75,45.45 U2.44 ; 33.775,45.425 v1(38.7,40.5) ; v1(44.8,21.8) R19.2 49,21.9 BUZ.1
  Bottom Layer w0.25: v1(38.7,40.5) 38.7,27.9 v1(44.8,21.8)
D_N: DN.1 H1.2 R4.1 | length 19.1
  Top Layer w0.381: R4.1@42.3,59.357 53.967,59.357 ; DN.1@53.986,57.881 53.986,59.339 53.967,59.357 ; H1.2@59.449,59.386 59.73,59.386 H1.2@59.737,59.378 ; H1.2@59.612,59.357 53.967,59.357
D_P: DP.1 H1.3 R3.1 | length 19.5
  Top Layer w0.381: R3.1@42.2,60.5 42.325,60.375 R3.1 42.325,60.225 42.485,60.066 43.234,60.066 43.308,59.992 54.046,59.992 ; DP.1 54.046,59.992 ; H1.3@59.449,60.021 59.73,60.021 H1.3@59.737,60.028 ; H1.3@59.612,59.992 54.046,59.992
DIR_SEL: DIR.1 P4.2 U2.32 | length 9.5
  Top Layer w0.25: P4.2 20.8,50.575 22.425,52.2 U2.32
ERROR_LED: ERR.1 R6.1 U2.48 | length 16.4
  Top Layer w0.25: U2.48 35.75,53.45 37.3,51.9 v1(37.8,51.9) ; v1@41.7,47.6 v1(41.8,47.7) 43.6,47.7 ERR.1 ; R6.1 v1@42,47.5
  Bottom Layer w0.25: v1(37.8,51.9) 37.8,51.8 41.8,47.8 v1(41.8,47.7)
EXT0: EXT.1 P1.2 U2.34 | length 38.5
  Top Layer w0.25: U2.34 28.75,26.35 P1.2
GND: C1.1 C2.1 C3.1 C4.1 C5.1 C6.1 C7.1 C8.1 C9.1 C10.1 C11.1 C12.1 C13.1 C15.2 C17.1 C18.1 C19.1 C20.1 C21.1 C22.1 C23.1 C24.1 C25.2 C26.2 D2.1 DL1.1 DL2.1 GND0.1 GND1.1 GND2.1 GND3.1 H1.5 H1.6 H2.5 H2.6 H3.3 H4.1 H4.3 P1.4 P2.1 P2.2 P2.3 P2.4 P4.1 Q1.2 R2.1 R5.1 R9.1 R21.1 S1.1 S2.1 U1.2 U2.2 U2.17 U2.46 U2.60 U3.2 U4.6 U4.7 U4.EPAD U5.2 U5.5 U6.9 U6.11 U6.18 U6.20 VR1.3 VR1.6 VR1.7 VR1.10 | length 15.8
  Top Layer w0.2: C18.1@3.271,64.729 C18.1 ; U3.2@3.4,66.954 U3.2 ; v1(21.1,60.3) v1@21.2,60.2 ; v1@43.3,62.6 v1(43.3,62.7) ; U6.9 49.112,35.135 v1(50.227,34.02) ; U6.11 48.435,35.935 49.5,37 C26.2
  Top Layer w0.5: C18.1 U3.2@3.4,66.954 ; U4.EPAD@18.365,24.865 v4(19,25.5) U4.EPAD@18.365,26.135 ; v1@21.2,60.2 C10.1 ; C11.1 v1@43.3,62.6 ; Q1.2 Q1.2@53,20.15
  Top Layer w0.7: C22.1@20.3,17.1 C22.1 ; C17.1@20.309,3.42 C17.1
  other v1: 42.015,57.09 53.479,64.278
IMU_INT: INT.1 U2.37 U6.12 | length 34.7
  Top Layer w0.25: U2.37 30.25,48.587 30.8,48.037 v1(30.8,47.9) ; U6.12@47.193,36.36 47.2,36.367 v1(47.2,37.9) 47.494,38.194 49.994,38.194 INT.1
  Bottom Layer w0.25: v1(30.8,47.9) 35.8,42.9 43.567,42.9 47.2,39.267 v1(47.2,37.9)
IMU_SCL: R20.1 SCL.1 U2.36 U6.23 | length 30.1
  Top Layer w0.2: R20.1@29.95,45.05 R20.1@30,45 ; R20.1@30,45.1 30,43.3 36.2,37.1 ; SCL.1 36.2,37.1 ; U6.23 38.565,34.735 36.2,37.1
  Top Layer w0.25: U2.36 29.75,45.15 R20.1
IMU_SDA: R13.1 SDA.1 U2.43 U6.24 | length 30.1
  Top Layer w0.2: v1(32.9,38.5) 37.065,34.335 ; R13.1 32.9,46.4 33.1,46.2 v1(33.1,42) ; R13.1@33.1,46.5 33.25,46.65 U2.43 ; SDA.1@34.9,34.2 35.035,34.335 37.065,34.335 ; U6.24 37.065,34.335
  Bottom Layer w0.2: v1(32.9,38.5) 33,38.6 33,41.9 v1(33.1,42)
JOY_BTN: JYB.1 U2.5 VR1.8 VR1.9 | length 28.5
  Top Layer w0.25: U2.5 33.75,66.602 34.048,66.9 34.048,68.82 42.75,77.523 VR1.9 43.8,80.72 JYB.1
  Bottom Layer w0.25: VR1.8 VR1.9
JOY_X: JYX.1 U2.4 VR1.2 | length 42.9
  Top Layer w0.25: U2.4 34.25,66.45 34.498,66.698 34.498,68.634 42.164,76.3 55.8,76.3 ; VR1.2 55.8,76.3 ; JYX.1@62.5,83 55.8,76.3
JOY_Y: JYY.1 U2.3 VR1.5 | length 41.1
  Top Layer w0.25: U2.3 34.75,66.311 34.975,66.536 34.975,68.475 41.1,74.6 48.7,74.6 50.8,72.5 ; VR1.5 52.55,70.75 50.8,72.5 ; JYY.1 62.1,69.6 59.2,72.5 50.8,72.5
LED_DATA_3V3: LTD3.1 U2.31 U5.4 | length 25.3
  Top Layer w0.25: LTD3.1 14.2,50.6 20.35,56.75 U2.31
  Top Layer w0.5: LTD3.1 14.2,41.35 U5.4
LED_DATA_5V: H3.2 LTD5.1 U5.3 | length 16.5
  Top Layer w0.5: v1(16.3,42.2) 16.3,41.3 16.425,41.3 17.275,40.45 U5.3 18.4,41.35 LTD5.1
  Bottom Layer w0.5: H3.2 14.5,40.4 v1(16.3,42.2)
nCH0: CH0.1 P3.1 U2.16 | length 14.8
  Top Layer w0.25: P3.1 22.6,72.5 28.25,66.85 U2.16
nCH1: CH1.1 P3.2 U2.15 | length 16.2
  Top Layer w0.25: CH1.1 25.14,72.24 25.14,74.46 ; P3.2 25.14,74.46 ; U2.15 28.75,70.85 25.14,74.46
nCH2: CH2.1 P3.3 U2.14 | length 15.3
  Top Layer w0.25: P3.3 29.25,76.43 29.25,73.65 ; CH2.1 29.25,73.65 ; U2.14 29.25,73.65
nCH3: CH3.1 P3.4 U2.13 | length 14.6
  Top Layer w0.25: U2.13 29.75,73.55 ; P3.4@29.75,77.77 29.75,73.55 ; CH3.1 29.75,73.55
NetC1_2: C1.2 R14.2 U1.1 U1.3 | length 5.1
  Top Layer w0.5: U1.1 25.5,36 25.5,34.4 R14.2 27.25,34.4 27.35,34.5 U1.3
NetC3_2: C3.2 U2.62 Y1.3 | length 17.4
  Top Layer w0.25: U2.62 v1@41.25,62.75
  Top Layer w0.3: v1(45.729,62.683) 46.769,62.683 46.78,62.694 Y1.3@47.23,62.244 ; Y1.3@47.23,61.831 Y1.3@47.23,62.244 ; C3.2@51.747,62.746 51.747,63.462 51.573,63.637 47.621,63.637 47.23,63.246 Y1.3@47.23,62.244
  Bottom Layer w0.3: v1(41.595,62.914) 42.581,63.9 44.552,63.9 v1@45.773,62.68
NetC4_2: C4.2 U2.61 Y1.1 | length 20.2
  Top Layer w0.3: U2.61 38.56,62.25 39.01,61.8 v1(39.1,61.8) ; Y1.1@49.725,57.485 49.73,57.49 Y1.1 ; Y1.1@50.4,57.5 50.9,57 C4.2@51.745,57 ; v1(51.728,55.428) 51.728,56.983 C4.2@51.745,57 ; C4.2 C4.2@51.745,57
  Bottom Layer w0.3: v1(39.1,61.8) 45.5,55.4 v1@51.7,55.4
NetC5_2: C5.2 C7.2 C9.2 C11.2 C13.2 R11.1 U2.1 U2.7 U2.18 U2.45 U2.58 | length 30.5
  Top Layer w0.2: U2.1 37.175,65.525 v1(37.4,65.3)
  Top Layer w0.25: C7.2 24.45,63.25 U2.18 27.51,63.25 27.86,62.9 v1(29,62.9) ; v1(33.1,63.6) 33.089,63.611 33.089,64.4 32.75,64.739 U2.7 32.75,66.55 32.95,66.75 32.95,67.15 C5.2 ; v1(33.5,56.4) 34.25,55.65 U2.45 34.25,52.25 C9.2 ; v1(35.5,61.3) 35.637,61.3 36.187,60.75 U2.58 39.4,60.75 40.25,61.6 C11.2 ; U2.1 35.75,67.45 C13.2
  Top Layer w0.5: R11.1 v1(26.8,53.3)
  Bottom Layer w0.2: v1(33.1,63.6) 35.7,63.6 v1(37.4,65.3)
NetC6_2: C6.2 C8.2 C10.2 C12.2 COR.1 L1.2 U2.8 U2.12 U2.24 U2.54 | length 39.9
  Top Layer w0.2: U2.24 27.893,60.25
  Top Layer w0.25: C10.2 24.45,60.25 U2.24 ; 27.893,60.25 30.55,60.25 ; U2.12 30.25,67.05 30.275,67.075 30.275,67.125 30.55,67.4 C8.2 C6.2 32.1,67.2 32.1,66.7 32.25,66.55 U2.8 32.25,64.353 32,64.103 32,61.7 30.55,60.25 ; U2.54 32.05,58.75 30.55,60.25 ; U2.54@37.764,58.75 38.448,58.75 39.398,57.8 40.3,57.8 C12.2 41,57.8 41.4,58.2 L1.2 44.5,57.216 45.716,56 48.7,56 COR.1@49.963,54.738
NetC14_1: C14.1 R5.2 | length 2.5
  Top Layer w0.25: R5.2@38.4,68.3 38.4,67.6 C14.1
NetC14_2: C14.2 C15.1 L1.1 PLL.1 U2.64 | length 13
  Top Layer w0.2: L1.1 44.5,63.8 PLL.1
  Top Layer w0.25: U2.64 38.75,63.75 ; C15.1 41.036,64.936 39.936,64.936 C14.2 38.75,63.75 ; PLL.1@44.5,63.8 44.45,63.75 38.75,63.75
NetC16_1: C16.1 D2.2 L2.1 U4.8 | length 22.1
  Top Layer w0.3: C16.1 C16.1@18.3,21.984
  Top Layer w0.5: L2.1 7.695,23.595 14.305,23.595 ; D2.2 12.7,25.2 14.305,23.595 ; C16.1@18.3,21.984 U4.8 14.305,23.595
NetC16_2: C16.2 U4.1 | length 2.4
  Top Layer w0.3: U4.1@21.311,23.511 U4.1
  Top Layer w0.5: C16.2 U4.1@21.311,23.511
NetC17_2: C17.2 F1.1 H4.2 RAW.1 | length 16.2
  Top Layer w0.8: RAW.1 RAW.1@25.1,12.5 ; F1.1 RAW.1@25.781,12.46
  Top Layer w0.9: C17.2 C17.2@20.981,9.26
  Top Layer w1.5: C17.2@20.981,9.26 F1.1@25.581,9.26
  Top Layer w2: H4.2 14.087,5.966 17.687,5.966 C17.2
NetC18_2: C18.2 L3.1 U3.1 | length 4.9
  Top Layer w0.9: L3.1 1.7,64.5 C18.2 1.8,65.825 2.227,66.253 U3.1
NetC19_2: C19.2 R15.2 U5.1 | length 3.5
  Top Layer w0.5: U5.1 17.725,38.55 18.3,37.975 18.3,36.9 18.3,35.7 R15.2@18.4,35.6
NetC20_2: C20.2 R16.1 U5.6 | length 3.3
  Top Layer w0.5: U5.6 15.325,38.55 15.4,38.475 15.4,38.25 15.7,37.95 C20.2 R16.1
NetC21_2: C21.2 R12.2 U4.2 U4.3 | length 5.6
  Top Layer w0.3: C21.2@23.965,24.865 C21.2 C21.2@24.1,24.8
  Top Layer w0.5: U4.3 U4.2 C21.2@23.965,24.865 ; C21.2@24.1,24.8 R12.2@25.6,24.8
NetC24_2: C24.2 C25.1 R17.1 U6.1 U6.8 U6.13 | length 24
  Top Layer w0.2: C25.1 43.853,31.3 44.253,31.7 ; U6.1 43.993,31.96 44.253,31.7 ; v1(45.4,39.5) 45.8,39.5 46.304,38.996 46.396,38.996 ; U6.13 45.993,38.593 46.396,38.996 ; C24.2 46.8,39.4 46.396,38.996 ; U6.8 48.288,34.735 48.8,34.223 v1(48.8,33.2) 47.3,31.7 44.253,31.7
  Top Layer w0.3: R17.1 47.1,40.65 C24.2
  Bottom Layer w0.2: v1(45.4,39.5) 45.4,37.6 48.8,34.2 v1(48.8,33.2)
NetC26_1: C26.1 U6.10 | length 3.1
  Top Layer w0.2: U6.10 50.135,35.535 C26.1
NetDL1_2: DL1.2 R7.2 | length 1.4
  Top Layer w0.5: DL1.2 38.65,44.65 39.95,44.65 R7.2
NetDL2_2: DL2.2 R6.2 | length 1.3
  Top Layer w0.5: R6.2 42.05,44.65 43.25,44.65 DL2.2
NetER1_1: ER1.1 U2.55 | length 9.3
  Top Layer w0.25: U2.55 38.947,59.25 39.297,58.9 v1(39.5,58.9) ; v1(42.2,54.9) ER1.1@44.227,54.9
  Bottom Layer w0.25: v1(39.5,58.9) 39.5,57.9 42.2,55.2 v1(42.2,54.9)
NetF1_2: F1.2 Q2.3 | length 4.1
  Top Layer w0.7: Q2.3 26.181,6.76 F1.2
NetL3_2: L3.2 R10.1 | length 2.8
  Top Layer w0.3: R10.1 R10.1@3.4,60.4
  Top Layer w0.9: R10.1@3.4,60.4 4.7,61.7 L3.2
NetP5_2: P5.2 Q1.3 R18.1 | length 14.3
  Top Layer w0.3: R18.1 50.1,20.8 Q1.3
  Top Layer w0.7: P5.2 49.1,13.9 R18.1
NetQ1_1: Q1.1 R19.1 | length 3.9
  Top Layer w0.5: R19.1@50.7,21.6 50.6,21.7 R19.1 50.7,21.9 50.7,22.396 50.993,22.689 52.059,22.689 52.348,22.4 52.348,21.45 Q1.1
NetQ2_1: Q2.1 R21.2 | length 3.4
  Top Layer w0.7: R21.2 27.431,5.21 Q2.1
NetR3_2: R3.2 U2.57 | length 3.3
  Top Layer w0.25: U2.57 40.75,60.25 R3.2
NetR4_2: R4.2 U2.56 | length 3.6
  Top Layer w0.25: U2.56 40.05,59.75 40.375,59.425 40.575,59.425 40.8,59.2 R4.2
nRST: H2.1 RST.1 S2.2 U2.39 | length 31
  Top Layer w0.25: U2.39 31.25,50.15 32.3,49.1 v1(32.3,48.8) ; v1(35.1,48.8) 46.3,48.8 S2.2 S2.2@50.54,48.76 ; S2.2@50.9,47.9 H2.1@57.56,47.9
  Bottom Layer w0.25: v1(32.3,48.8) v1(35.1,48.8)
nSLEEP_BTN: S1.2 SLP.1 U2.30 | length 20.1
  Top Layer w0.25: S1.2 8.948,55.4 SLP.1 13.45,57.25 U2.30
RADIO_CE: CE.1 U2.26 U3.3 | length 30.1
  Top Layer w0.25: U3.3@4.543,67.4 4.8,67.143 4.8,64.6 8.4,61 v1(8.4,60.75) 7.25,59.6 CE.1 ; v1(19.1,59.7) 19.55,59.25 U2.26
  Bottom Layer w0.25: v1(8.4,60.75) 9.775,59.375 18.775,59.375 v1(19.1,59.7)
RADIO_CSN: CSN.1 U2.28 U3.4 | length 29.1
  Top Layer w0.25: U3.4@5.814,67.4 6.139,67.075 6.139,64.461 12.35,58.25 ; CSN.1 9.35,58.25 12.35,58.25 ; U2.28 12.35,58.25
RADIO_IRQ: IRQ.1 U2.20 U3.8 | length 17.3
  Top Layer w0.25: U3.8 17.264,67.053 IRQ.1 22.067,62.25 U2.20
RADIO_MISO: MISO.1 U2.27 U3.7 | length 24.9
  Top Layer w0.2: MISO.1 14.9,60.2 v1(16.9,60.2)
  Top Layer w0.25: U3.7@9.629,67.4 9.629,66.271 10.903,64.997 v1(11.192,64.997) ; v1(16.9,60.2) 18.35,58.75 U2.27
  Bottom Layer w0.2: v1(11.192,64.997) 14.188,64.997 16.9,62.286 v1(16.9,60.2)
RADIO_MOSI: MOSI.1 U2.22 U3.6 | length 23.2
  Top Layer w0.25: U3.6@8.357,67.4 8.357,66.186 13.293,61.25 ; MOSI.1 11.55,61.25 13.293,61.25 ; MOSI.1@11.719,61.581 MOSI.1@11.75,61.55 ; U2.22 13.293,61.25
RADIO_SCK: SCK.1 U2.21 U3.5 | length 25.3
  Top Layer w0.2: U3.5@7.086,67.4 7.293,67.193 7.293,65.477 7.13,65.314 7.086,65.314 v1(7.293,65.107) 7.493,65.107 SCK.1
  Top Layer w0.25: v1(13.953,63.311) 19.248,63.311 20.809,61.75 U2.21
  Bottom Layer w0.2: v1(7.293,65.107) 9.089,63.311 v1(13.953,63.311)
STATUS_LED: R7.1 STAT.1 U2.47 | length 14.7
  Top Layer w0.25: U2.47 35.25,52.75 v1(37.9,50.1) ; STAT.1 37.1,47.7 v1(39.8,47.7) 40,47.5 R7.1
  Bottom Layer w0.25: v1@37.6,50 39.8,47.8 v1(39.8,47.7)
SWCLK: H2.2 SWC.1 U2.53 | length 45.8
  Top Layer w0.25: U2.53@38.002,58.25 38.311,58.25 39.525,57.036 39.525,55.865 42.944,52.447 56.359,52.447 59.84,48.966 59.84,48.16 60.1,47.9 61.7,46.3 SWC.1
SWDIO: H2.4 SWD.1 U2.51 | length 31.5
  Top Layer w0.25: U2.51 38.311,57.25 39.075,56.486 39.075,55.679 42.757,51.997 ; SWD.1@44,51 43.754,51 42.757,51.997 ; H2.4@59.832,45.628 H2.4@60.1,45.36 ; H2.4@60.19,45.541 60.045,45.541 58.711,46.876 58.711,49.459 56.173,51.997 42.757,51.997
USB_DETECT: R1.1 R2.2 U2.52 USB.1 | length 29.2
  Top Layer w0.25: v1(35.3,57.8) 35.35,57.75 U2.52 ; v1(51.734,53.574) 52.934,54.774 USB.1 ; USB.1@54.3,54.8 55.5,56 R2.2@56.5,56 ; R1.1 56.085,57.825 R2.2@56.085,56.075
  Bottom Layer w0.25: v1(35.3,57.8) 40.9,52.2 50.5,52.2 v1@51.9,53.6
VBAT: Q2.2 R8.2 R12.1 VBAT.1 | length 12.3
  Top Layer w0.5: R8.2 28.9,13.9 v1(28.9,13.8) ; Q2.2 29.381,5.91 ; VBAT.1 29.381,3.36 29.381,5.91 ; v1(30.181,7.16) 30.181,7.025 29.381,6.225 29.381,5.91
  Top Layer w0.7: R12.1 v1(27.6,23.3)
VBUS: BUS.1 H1.1 R1.2 | length 15.5
  Top Layer w0.38: BUS.1 v1(56.873,63.414) ; v1(57.735,55.501) 57.61,55.501 57.51,55.601 R1.2 57.51,58.001 57.829,58.32 57.837,58.32 58.217,58.7 H1.1@59.612,58.7 ; H1.1@59.449,58.728 H1.1@59.737,58.728
  Bottom Layer w0.38: v1(56.873,63.414) 56.873,56.362 v1(57.735,55.501)
pads on no net: H1.4 H2.3 H2.9 H2.10 P4.3 U1.4 U2.6 U2.10 U2.11 U2.19 U2.23 U2.25 U2.29 U2.33 U2.35 U2.38 U2.40 U2.41 U2.42 U2.49 U2.50 U2.59 U2.63 U4.4 U6.2 U6.3 U6.4 U6.5 U6.6 U6.7 U6.14 U6.15 U6.16 U6.17 U6.19 U6.21 VR1.11 VR1.12 VR1.13 VR1.14 Y1.2 Y1.4
copper on no net:
  other v3: 44.993,35.335

## Polygon pours and split planes (outlines as drawn)
no net on Top Layer "Top Layer-No Net" (solid, pour order 6): -2.1,87.7
no net on Top Layer "Top Layer-No Net 1" (solid, pour order 4): 16.8,78.4
GND on Top Layer "Top Layer-GND" (solid, remove dead copper, pour order 2): -1.1,87.1 -0.5,86.5 69,86.5 69,-1.3 66.3,-4 -2,-4
no net on Top Layer "Top Layer-No Net 2" (solid, pour order 0): 17.7,69
GND on Bottom Layer "Bottom Layer-GND" (solid, remove dead copper, pour order 8): -4.5,89.8 69.1,89.8 70.9,88 68.1,85.2 68.1,-1.7 -0.6,-1.7 -3.2,-4.3
GND on Ground Plane (split plane): 63.49,0.51 0.51,0.51 0.51,66.4 13.8,66.4 21.1,73.7 21.1,84.49 63.49,84.49
5V on Power Plane (split plane): 22.408,33.708 22.45,33.68 22.5,33.671 37.346,33.671 63.49,7.527 63.49,0.51 31.029,0.51 31.029,22 31.02,22.05 30.992,22.092 28.192,24.892 28.15,24.92 28.1,24.929 25.5,24.929 25.45,24.92 25.408,24.892 22.808,22.292 22.78,22.25 22.771,22.2 22.771,0.51 0.51,0.51 0.51,39.671 16.446,39.671
3V3 on Power Plane (split plane): 63.49,7.894 37.492,33.892 37.45,33.92 37.4,33.929 22.554,33.929 16.592,39.892 16.55,39.92 16.5,39.929 0.51,39.929 0.51,66.4 13.7,66.4 13.8,66.3 21,73.5 21,84.49 63.49,84.49
VBAT on Power Plane (split plane): 30.771,21.946 30.771,0.51 23.029,0.51 23.029,22.146 25.554,24.671 28.046,24.671
NetC5_2 on Power Plane (split plane): 40.171,64.046 40.171,54.954 36.446,51.229 25.854,51.229 23.608,53.475 23.608,64.925 26.254,67.571 36.646,67.571

## Other copper
Top Layer:
  pour cut-out: -1.1,66.4 -1,66.3 13.7,66.3 21,73.6 21,86.9 -0.5,86.9 -2,85.4 -2,83.7
Bottom Layer:
  pour cut-out: -6.8,78.9
  pour cut-out: -1.2,66.3 14.1,66.3 21,73.2 21,86.8 -0.3,86.8 -0.5,87 -1.9,85.6 -2.1,85.6
Ground Plane (plane layer: these items are gaps in the copper):
  pour cut-out: -1.5,66.4 13.8,66.4 21.1,73.7 21.1,86.4 -1.6,86.7
Power Plane (plane layer: these items are gaps in the copper):
  pour cut-out: -1.5,66.4 13.7,66.4 13.8,66.3 21,73.5 21,86.9 20.8,86.7 -1.7,86.7
  lines w0.254: -1.2,39.8 16.5,39.8 22.5,33.8 37.4,33.8 65,6.2 ; 25.85,51.1 36.5,51.1 40.3,54.9 40.3,64.1 36.7,67.7 26.2,67.7 23.479,64.979 23.479,53.421 25.8,51.1 26.9,51.1 ; 22.9,-0.5 22.9,22.2 25.5,24.8 28.1,24.8 30.9,22 30.9,-1.8 30.8,-1.9 24.3,-1.9 22.9,-0.5

## Silkscreen, mask and mechanical layers (free items; w line width, h text height)
Top Overlay:
  text "4" at 29.956,82.32 h0.7
  text "1" at 22.428,82.267 h0.7
  text "2" at 24.957,82.229 h0.7
  text "3" at 27.43,82.229 h0.7
  text "CH_SEL" at 32.04,81.276 h0.7 r270
  text "SLEEP" at 3.787,56.397 h0.7
  text "SWD" at 60.203,53.49 h0.7
  text "DIR_SEL" at 18.696,50.982 h0.7
  text "IMU" at 17.136,46.557 h0.7
  text "JOY" at 22.534,46.562 h0.7
  text "RESET" at 48.119,43.735 h0.7 r90
  text "LED_TAPE" at 3.48,35.192 h0.7
  text "3V3" at 37.928,21.258 h0.7
  text "EXT0" at 38.024,18.722 h0.7